# EAGLE board SparkFun_STM32 Thing Plus-Panel (EAGLE 9.6.2), part 1 of 6
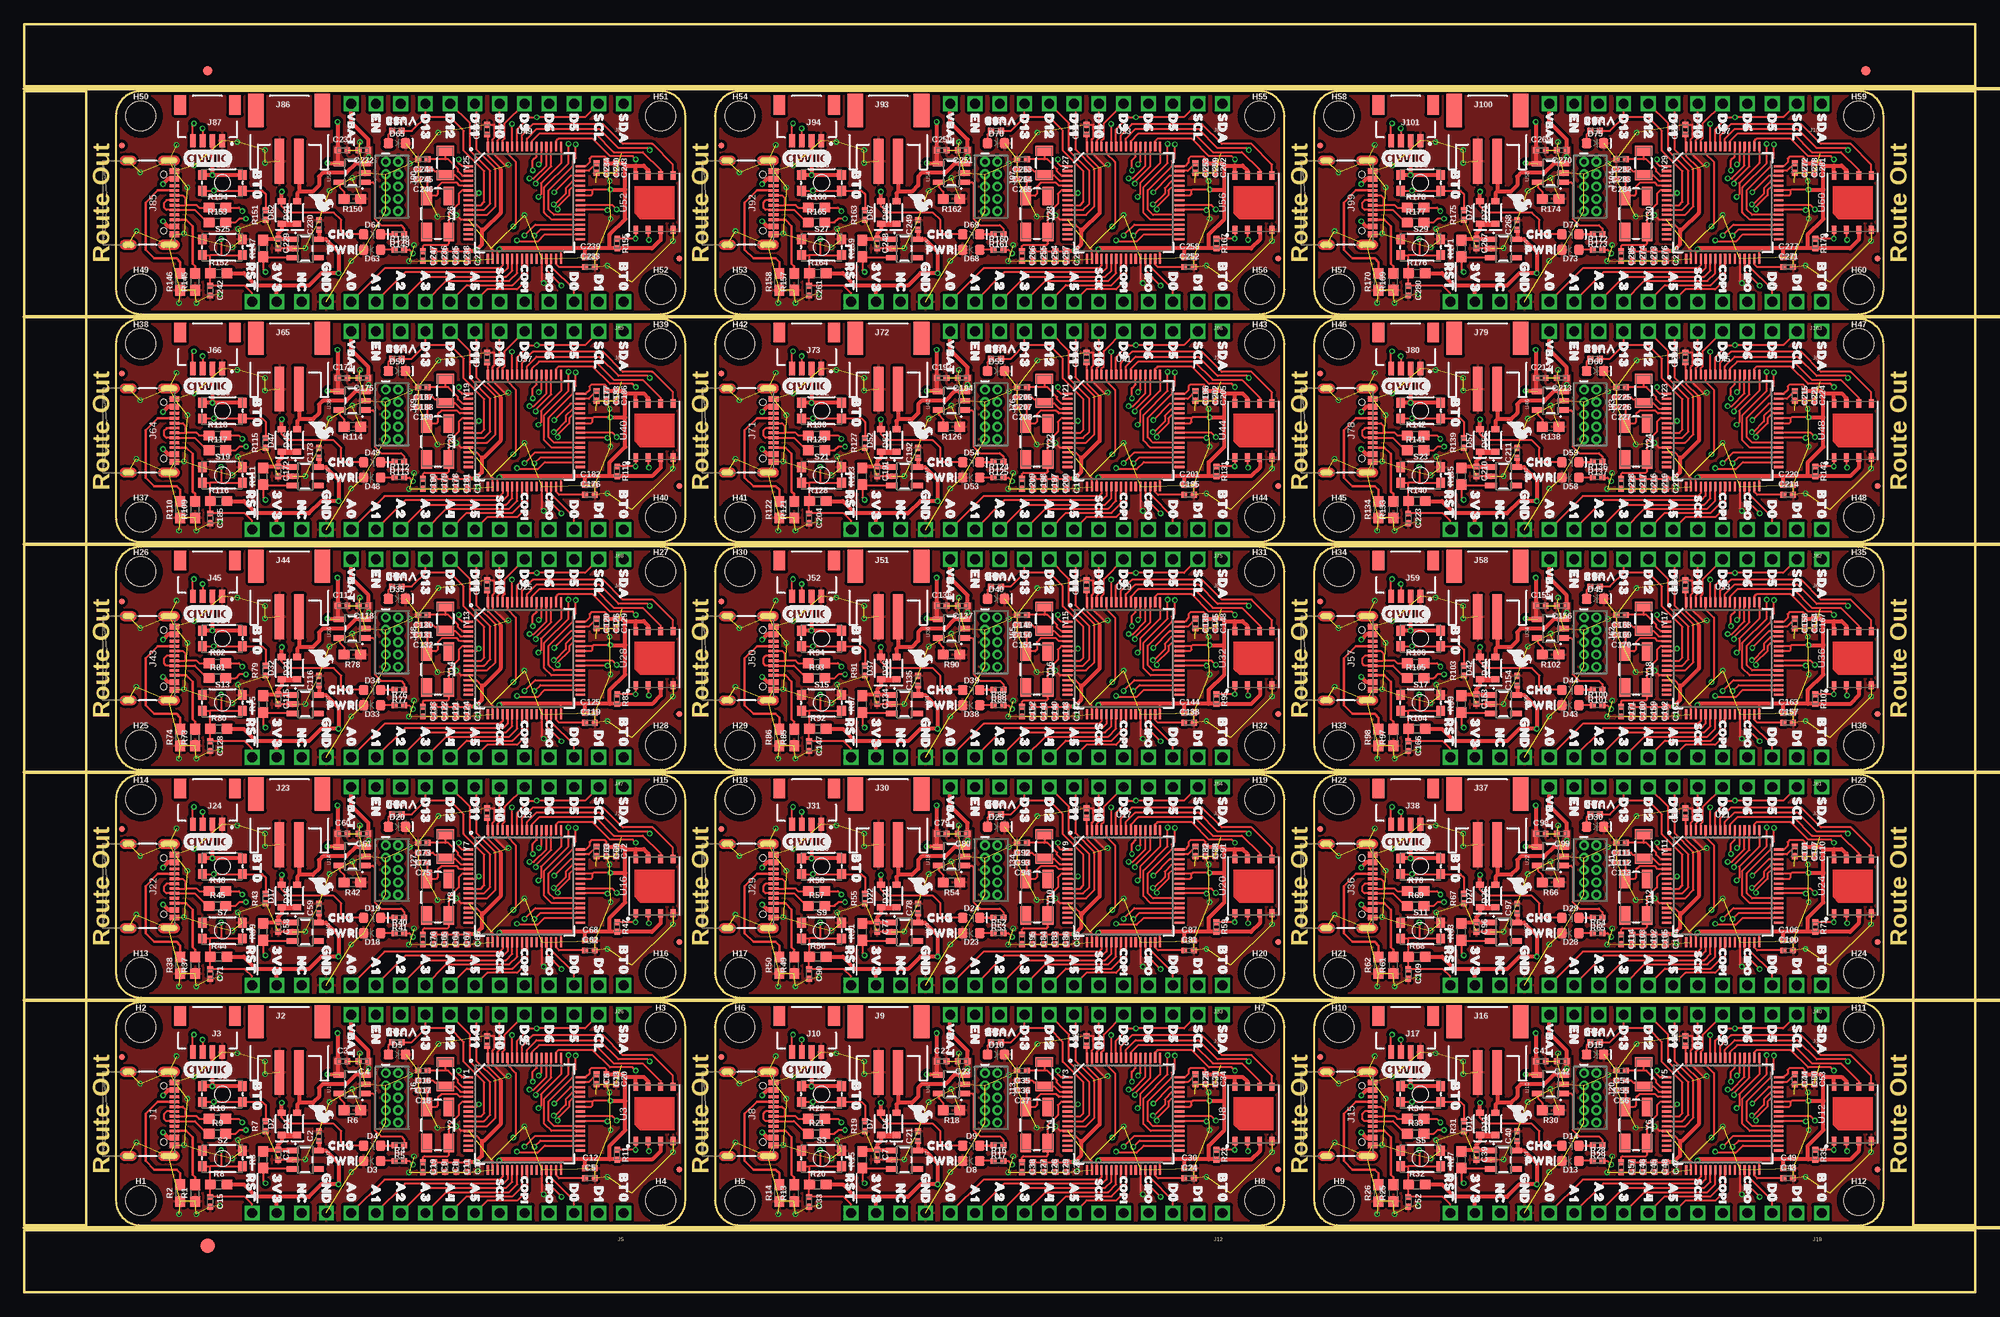
[diagram p0: board, top side]
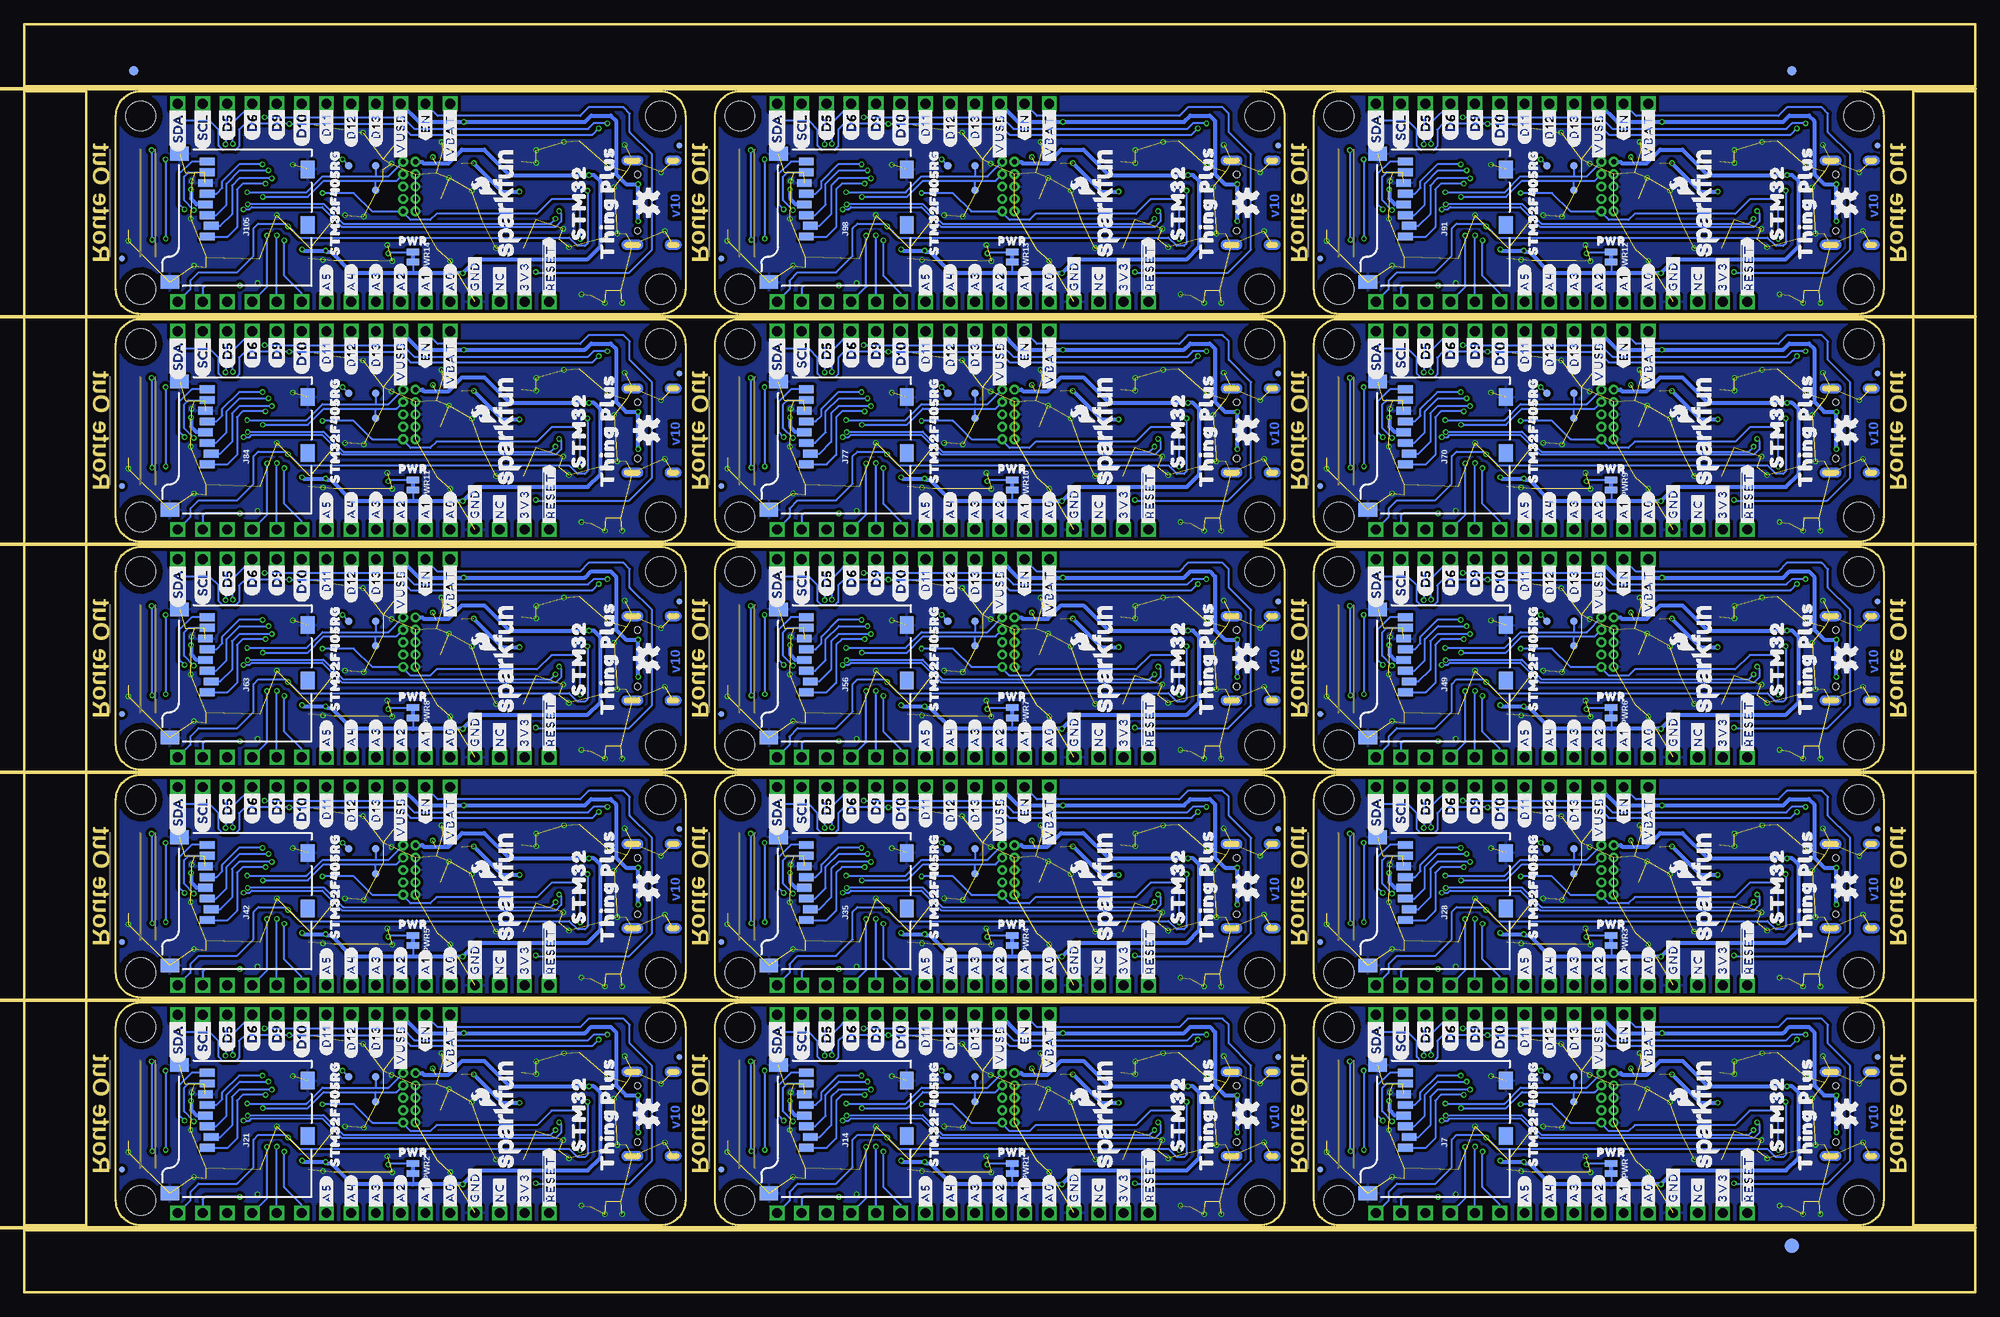
[diagram p1: board, bottom side, seen from below]

Size 200.15 x 130.05 mm. Coordinates in mm from the lower left corner, seen from the top.
Outline: 11.94,6.86 65.28,6.86 arc90 67.82,9.4 67.82,27.18 arc90 65.28,29.72 11.94,29.72 arc90 9.4,27.18 9.4,9.4 arc90 11.94,6.86
Outline: 73.41,6.86 126.75,6.86 arc90 129.29,9.4 129.29,27.18 arc90 126.75,29.72 73.41,29.72 arc90 70.87,27.18 70.87,9.4 arc90 73.41,6.86
Outline: 134.87,6.86 188.21,6.86 arc90 190.75,9.4 190.75,27.18 arc90 188.21,29.72 134.87,29.72 arc90 132.33,27.18 132.33,9.4 arc90 134.87,6.86
Outline: 11.94,30.23 65.28,30.23 arc90 67.82,32.77 67.82,50.55 arc90 65.28,53.09 11.94,53.09 arc90 9.4,50.55 9.4,32.77 arc90 11.94,30.23
Outline: 73.41,30.23 126.75,30.23 arc90 129.29,32.77 129.29,50.55 arc90 126.75,53.09 73.41,53.09 arc90 70.87,50.55 70.87,32.77 arc90 73.41,30.23
Outline: 134.87,30.23 188.21,30.23 arc90 190.75,32.77 190.75,50.55 arc90 188.21,53.09 134.87,53.09 arc90 132.33,50.55 132.33,32.77 arc90 134.87,30.23
Outline: 11.94,53.59 65.28,53.59 arc90 67.82,56.13 67.82,73.91 arc90 65.28,76.45 11.94,76.45 arc90 9.4,73.91 9.4,56.13 arc90 11.94,53.59
Outline: 73.41,53.59 126.75,53.59 arc90 129.29,56.13 129.29,73.91 arc90 126.75,76.45 73.41,76.45 arc90 70.87,73.91 70.87,56.13 arc90 73.41,53.59
Outline: 134.87,53.59 188.21,53.59 arc90 190.75,56.13 190.75,73.91 arc90 188.21,76.45 134.87,76.45 arc90 132.33,73.91 132.33,56.13 arc90 134.87,53.59
Outline: 11.94,76.96 65.28,76.96 arc90 67.82,79.5 67.82,97.28 arc90 65.28,99.82 11.94,99.82 arc90 9.4,97.28 9.4,79.5 arc90 11.94,76.96
Outline: 73.41,76.96 126.75,76.96 arc90 129.29,79.5 129.29,97.28 arc90 126.75,99.82 73.41,99.82 arc90 70.87,97.28 70.87,79.5 arc90 73.41,76.96
Outline: 134.87,76.96 188.21,76.96 arc90 190.75,79.5 190.75,97.28 arc90 188.21,99.82 134.87,99.82 arc90 132.33,97.28 132.33,79.5 arc90 134.87,76.96
Outline: 11.94,100.33 65.28,100.33 arc90 67.82,102.87 67.82,120.65 arc90 65.28,123.19 11.94,123.19 arc90 9.4,120.65 9.4,102.87 arc90 11.94,100.33
Outline: 73.41,100.33 126.75,100.33 arc90 129.29,102.87 129.29,120.65 arc90 126.75,123.19 73.41,123.19 arc90 70.87,120.65 70.87,102.87 arc90 73.41,100.33
Outline: 134.87,100.33 188.21,100.33 arc90 190.75,102.87 190.75,120.65 arc90 188.21,123.19 134.87,123.19 arc90 132.33,120.65 132.33,102.87 arc90 134.87,100.33
Outline: 0,6.35 200.15,6.35 200.15,0 0,0 0,6.35
Outline: 193.8,123.19 200.15,123.19 200.15,6.86 193.8,6.86 193.8,123.19
Outline: 0,130.05 200.15,130.05 200.15,123.7 0,123.7 0,130.05
Outline: 0,123.19 6.35,123.19 6.35,6.86 0,6.86 0,123.19
Copper layers (1*16): Top 0.035mm / dielectric 1.5mm / Bottom 0.035mm
Design rules "SparkFun_STM32 Thing Plus": minimum track width 4mil, minimum drill 6mil, track to track 4mil, track to pad 4mil, pad to pad 4mil, via to via 4mil, smd to smd 4mil, copper to edge 4mil, drill to drill 4mil, minimum pad ring 5mil, minimum via ring 5mil, stop-mask expansion 4mil, vias tented up to drill 25mil, thermal gap 10mil
Milling: 6 lines

## Footprints (pad centres in the part's own frame; a part is rotated, then mirrored left to right if it is on the bottom)
0402-TIGHT = smd 0.6 x 0.6: 1 -0.5,0; 2 0.5,0
SOD-323 = smd 0.63 x 0.83: A 1.15,0; C -1.15,0
LED-0603 = smd 1 x 1: A -0.877,0; C 0.877,0
FIDUCIAL-1X2 = smd 1 x 1: 1 0,0
FIDUCIAL-1.5X3 = smd 1.5 x 1.5: 1 0,0
FIDUCIAL-MICRO = smd 0.635 x 0.635: 1 0,0
STAND-OFF-TIGHT = hole 3.048: 0,0
USB-C-16P-2LAYER-PADS = smd 0.3 x 1: A5 -1.25,-0.34; A6 -0.25,-0.34; A7 0.25,-0.34; A8 1.25,-0.34; B5 1.75,-0.34; B6 0.75,-0.34; B7 -0.75,-0.34; B8 -1.75,-0.34 | smd 0.6 x 1: GND -3.225,-0.34; GND2 3.225,-0.34; VBUS1 -2.45,-0.34; VBUS2 2.45,-0.34 | drill 0.4 pad 0.6 long: SHLD1 -4.318,-0.915; SHLD2 4.318,-0.915; SHLD3 -4.318,-5.095; SHLD4 4.318,-5.095 | hole 0.65: -2.89,-1.445; 2.89,-1.445
JST-2-SMD = smd 1 x 4.6: 1 -1,-3.7; 2 1,-3.7 | smd 1.6 x 3.4: NC1 -3.4,1.5; NC2 3.4,1.5
JST04_1MM_RA = smd 0.6 x 1.35: 1 -1.5,0; 2 -0.5,0; 3 0.5,0; 4 1.5,0 | smd 1.2 x 2: NC1 2.8,-3.675; NC2 -2.8,-3.675
1X12_SM_SQ_NOSILK = drill 1.016 pad 1.27 square: 1 0,0; 2 2.54,0; 3 5.08,0; 4 7.62,0; 5 10.16,0; 6 12.7,0; 7 15.24,0; 8 17.78,0; 9 20.32,0; 10 22.86,0; 11 25.4,0; 12 27.94,0
1X16_SM_SQ_NOSILK = drill 1.016 pad 1.27 square: 1 0,0; 2 2.54,0; 3 5.08,0; 4 7.62,0; 5 10.16,0; 6 12.7,0; 7 15.24,0; 8 17.78,0; 9 20.32,0; 10 22.86,0; 11 25.4,0; 12 27.94,0; 13 30.48,0; 14 33.02,0; 15 35.56,0; 16 38.1,0
2X5-PTH-1.27MM-NO_SILK = drill 0.508 pad 1: 1 -2.54,-0.635; 2 -2.54,0.635; 3 -1.27,-0.635; 4 -1.27,0.635; 5 0,-0.635; 6 0,0.635; 7 1.27,-0.635; 8 1.27,0.635; 9 2.54,-0.635; 10 2.54,0.635
MICRO-SD-SOCKET = smd 1.8 x 1.4: CD1 -2.05,0.4; CD2 -7.75,0.4 | smd 0.8 x 1.5: CS/DAT3 -7.84,10.3; DAT1 -1.24,10.7; DAT2 -8.94,10.7; DI/CMD -6.74,10.7; DO/DAT0 -2.34,10.7; GND -3.44,10.9; SCLK -4.54,10.7; VCC -5.64,10.9 | smd 1.4 x 1.9: GND1 -13.6,14.55; GND3 -0.45,13.55
SMT-JUMPER_2_NC_TRACE_NO-SILK = smd 0.66 x 1.27: 1 -0.521,0; 2 0.521,0
0603 = smd 1.1 x 1: 1 -0.85,0; 2 0.85,0
TACTILE_SWITCH_SMD_4.6X2.8MM = smd 0.9 x 1: 1 -2.05,-0.8; 2 2.05,-0.8; 3 2.05,0.8; 4 -2.05,0.8
PAD.03X.03 = smd 0.762 x 0.762: P$1 0,0
SOT23-5 = smd 0.55 x 1.2: 1 -0.95,-1.3; 2 0,-1.3; 3 0.95,-1.3; 4 0.95,1.3; 5 -0.95,1.3
WSON-8-6X5 = smd 0.85 x 0.5: 1 -2.775,1.905; 2 -2.775,0.635; 3 -2.775,-0.635; 4 -2.775,-1.905; 5 2.775,-1.905; 6 2.775,-0.635; 7 2.775,0.635; 8 2.775,1.905
TQFP64 = smd 0.22 x 1: 1 -3.75,-5.75; 2 -3.25,-5.75; 3 -2.75,-5.75; 4 -2.25,-5.75; 5 -1.75,-5.75; 6 -1.25,-5.75; 7 -0.75,-5.75; 8 -0.25,-5.75; 9 0.25,-5.75; 10 0.75,-5.75; 11 1.25,-5.75; 12 1.75,-5.75; 13 2.25,-5.75; 14 2.75,-5.75; 15 3.25,-5.75; 16 3.75,-5.75; 33 3.75,5.75; 34 3.25,5.75; 35 2.75,5.75; 36 2.25,5.75; 37 1.75,5.75; 38 1.25,5.75; 39 0.75,5.75; 40 0.25,5.75; 41 -0.25,5.75; 42 -0.75,5.75; 43 -1.25,5.75; 44 -1.75,5.75; 45 -2.25,5.75; 46 -2.75,5.75; 47 -3.25,5.75; 48 -3.75,5.75 | smd 1 x 0.22: 17 5.75,-3.75; 18 5.75,-3.25; 19 5.75,-2.75; 20 5.75,-2.25; 21 5.75,-1.75; 22 5.75,-1.25; 23 5.75,-0.75; 24 5.75,-0.25; 25 5.75,0.25; 26 5.75,0.75; 27 5.75,1.25; 28 5.75,1.75; 29 5.75,2.25; 30 5.75,2.75; 31 5.75,3.25; 32 5.75,3.75; 49 -5.75,3.75; 50 -5.75,3.25; 51 -5.75,2.75; 52 -5.75,2.25; 53 -5.75,1.75; 54 -5.75,1.25; 55 -5.75,0.75; 56 -5.75,0.25; 57 -5.75,-0.25; 58 -5.75,-0.75; 59 -5.75,-1.25; 60 -5.75,-1.75; 61 -5.75,-2.25; 62 -5.75,-2.75; 63 -5.75,-3.25; 64 -5.75,-3.75
CRYSTAL-SMD-3.2X1.5MM = smd 1 x 1.8: P$1 -1.25,0; P$2 1.25,0
CRYSTAL-SMD-5X3.2-4PAD = smd 1.9 x 1.1: 1 -1.85,-1.15; 2 1.85,-1.15; 3 1.85,1.15; 4 -1.85,1.15

## Placement (x,y rotation side)
C1  1.0uF  [0402-TIGHT]  26.04,14.1 270 top
C2  1.0uF  [0402-TIGHT]  30.23,16 90 top
C3  4.7uF  [0402-TIGHT]  32.64,23.67 0 top
C4  4.7uF  [0402-TIGHT]  34.8,23.67 180 top
C5  2.2uF  [0402-TIGHT]  58.04,11.68 0 top
C6  2.2uF  [0402-TIGHT]  58.7,21.84 270 top
C7  1.0uF  [0402-TIGHT]  87.5,14.1 270 top
C8  0.1uF  [0402-TIGHT]  43.18,12.83 270 top
C9  1.0uF  [0402-TIGHT]  42.04,12.83 270 top
C10  4.7uF  [0402-TIGHT]  45.47,12.83 270 top
C11  0.1uF  [0402-TIGHT]  44.32,12.83 270 top
C12  0.1uF  [0402-TIGHT]  58.04,12.7 0 top
C13  0.1uF  [0402-TIGHT]  59.72,21.84 270 top
C14  0.1uF  [0402-TIGHT]  47.5,25.78 90 top
C15  0.1uF  [0402-TIGHT]  19.05,9.27 270 top
C16  15pF  [0402-TIGHT]  40.89,22.73 180 top
C17  15pF  [0402-TIGHT]  40.89,21.72 180 top
C18  22pF  [0402-TIGHT]  40.89,20.7 180 top
C19  22pF  [0402-TIGHT]  40.89,12.82 270 top
C20  0.1uF  [0402-TIGHT]  60.71,21.84 270 top
C21  1.0uF  [0402-TIGHT]  91.69,16 90 top
C22  4.7uF  [0402-TIGHT]  94.11,23.67 0 top
C23  4.7uF  [0402-TIGHT]  96.27,23.67 180 top
C24  2.2uF  [0402-TIGHT]  119.51,11.68 0 top
C25  2.2uF  [0402-TIGHT]  120.17,21.84 270 top
C26  0.1uF  [0402-TIGHT]  104.65,12.83 270 top
C27  1.0uF  [0402-TIGHT]  103.5,12.83 270 top
C28  4.7uF  [0402-TIGHT]  106.93,12.83 270 top
C29  0.1uF  [0402-TIGHT]  105.79,12.83 270 top
C30  0.1uF  [0402-TIGHT]  119.51,12.7 0 top
C31  0.1uF  [0402-TIGHT]  121.18,21.84 270 top
C32  0.1uF  [0402-TIGHT]  108.97,25.78 90 top
C33  0.1uF  [0402-TIGHT]  80.52,9.27 270 top
C34  0.1uF  [0402-TIGHT]  122.17,21.84 270 top
C35  15pF  [0402-TIGHT]  102.35,22.73 180 top
C36  15pF  [0402-TIGHT]  102.35,21.72 180 top
C37  22pF  [0402-TIGHT]  102.35,20.7 180 top
C38  22pF  [0402-TIGHT]  102.36,12.82 270 top
C39  1.0uF  [0402-TIGHT]  148.97,14.1 270 top
C40  1.0uF  [0402-TIGHT]  153.16,16 90 top
C41  4.7uF  [0402-TIGHT]  155.57,23.67 0 top
C42  4.7uF  [0402-TIGHT]  157.73,23.67 180 top
C43  2.2uF  [0402-TIGHT]  180.97,11.68 0 top
C44  2.2uF  [0402-TIGHT]  181.64,21.84 270 top
C45  0.1uF  [0402-TIGHT]  166.12,12.83 270 top
C46  1.0uF  [0402-TIGHT]  164.97,12.83 270 top
C47  4.7uF  [0402-TIGHT]  168.4,12.83 270 top
C48  0.1uF  [0402-TIGHT]  167.26,12.83 270 top
C49  0.1uF  [0402-TIGHT]  180.97,12.7 0 top
C50  0.1uF  [0402-TIGHT]  182.65,21.84 270 top
C51  0.1uF  [0402-TIGHT]  170.43,25.78 90 top
C52  0.1uF  [0402-TIGHT]  141.99,9.27 270 top
C53  0.1uF  [0402-TIGHT]  183.64,21.84 270 top
C54  15pF  [0402-TIGHT]  163.82,22.73 180 top
C55  15pF  [0402-TIGHT]  163.82,21.72 180 top
C56  22pF  [0402-TIGHT]  163.82,20.7 180 top
C57  22pF  [0402-TIGHT]  163.83,12.82 270 top
C58  1.0uF  [0402-TIGHT]  26.04,37.46 270 top
C59  1.0uF  [0402-TIGHT]  30.23,39.37 90 top
C60  4.7uF  [0402-TIGHT]  32.64,47.04 0 top
C61  4.7uF  [0402-TIGHT]  34.8,47.04 180 top
C62  2.2uF  [0402-TIGHT]  58.04,35.05 0 top
C63  2.2uF  [0402-TIGHT]  58.7,45.21 270 top
C64  0.1uF  [0402-TIGHT]  43.18,36.2 270 top
C65  1.0uF  [0402-TIGHT]  42.04,36.2 270 top
C66  4.7uF  [0402-TIGHT]  45.47,36.2 270 top
C67  0.1uF  [0402-TIGHT]  44.32,36.2 270 top
C68  0.1uF  [0402-TIGHT]  58.04,36.07 0 top
C69  0.1uF  [0402-TIGHT]  59.72,45.21 270 top
C70  0.1uF  [0402-TIGHT]  47.5,49.15 90 top
C71  0.1uF  [0402-TIGHT]  19.05,32.64 270 top
C72  0.1uF  [0402-TIGHT]  60.71,45.21 270 top
C73  15pF  [0402-TIGHT]  40.89,46.1 180 top
C74  15pF  [0402-TIGHT]  40.89,45.08 180 top
C75  22pF  [0402-TIGHT]  40.89,44.07 180 top
C76  22pF  [0402-TIGHT]  40.89,36.19 270 top
C77  1.0uF  [0402-TIGHT]  87.5,37.46 270 top
C78  1.0uF  [0402-TIGHT]  91.69,39.37 90 top
C79  4.7uF  [0402-TIGHT]  94.11,47.04 0 top
C80  4.7uF  [0402-TIGHT]  96.27,47.04 180 top
C81  2.2uF  [0402-TIGHT]  119.51,35.05 0 top
C82  2.2uF  [0402-TIGHT]  120.17,45.21 270 top
C83  0.1uF  [0402-TIGHT]  104.65,36.2 270 top
C84  1.0uF  [0402-TIGHT]  103.5,36.2 270 top
C85  4.7uF  [0402-TIGHT]  106.93,36.2 270 top
C86  0.1uF  [0402-TIGHT]  105.79,36.2 270 top
C87  0.1uF  [0402-TIGHT]  119.51,36.07 0 top
C88  0.1uF  [0402-TIGHT]  121.18,45.21 270 top
C89  0.1uF  [0402-TIGHT]  108.97,49.15 90 top
C90  0.1uF  [0402-TIGHT]  80.52,32.64 270 top
C91  0.1uF  [0402-TIGHT]  122.17,45.21 270 top
C92  15pF  [0402-TIGHT]  102.35,46.1 180 top
C93  15pF  [0402-TIGHT]  102.35,45.08 180 top
C94  22pF  [0402-TIGHT]  102.35,44.07 180 top
C95  22pF  [0402-TIGHT]  102.36,36.19 270 top
C96  1.0uF  [0402-TIGHT]  148.97,37.46 270 top
C97  1.0uF  [0402-TIGHT]  153.16,39.37 90 top
C98  4.7uF  [0402-TIGHT]  155.57,47.04 0 top
C99  4.7uF  [0402-TIGHT]  157.73,47.04 180 top
C100  2.2uF  [0402-TIGHT]  180.97,35.05 0 top
C101  2.2uF  [0402-TIGHT]  181.64,45.21 270 top
C102  0.1uF  [0402-TIGHT]  166.12,36.2 270 top
C103  1.0uF  [0402-TIGHT]  164.97,36.2 270 top
C104  4.7uF  [0402-TIGHT]  168.4,36.2 270 top
C105  0.1uF  [0402-TIGHT]  167.26,36.2 270 top
C106  0.1uF  [0402-TIGHT]  180.97,36.07 0 top
C107  0.1uF  [0402-TIGHT]  182.65,45.21 270 top
C108  0.1uF  [0402-TIGHT]  170.43,49.15 90 top
C109  0.1uF  [0402-TIGHT]  141.99,32.64 270 top
C110  0.1uF  [0402-TIGHT]  183.64,45.21 270 top
C111  15pF  [0402-TIGHT]  163.82,46.1 180 top
C112  15pF  [0402-TIGHT]  163.82,45.08 180 top
C113  22pF  [0402-TIGHT]  163.82,44.07 180 top
C114  22pF  [0402-TIGHT]  163.83,36.19 270 top
C115  1.0uF  [0402-TIGHT]  26.04,60.83 270 top
C116  1.0uF  [0402-TIGHT]  30.23,62.74 90 top
C117  4.7uF  [0402-TIGHT]  32.64,70.41 0 top
C118  4.7uF  [0402-TIGHT]  34.8,70.41 180 top
C119  2.2uF  [0402-TIGHT]  58.04,58.42 0 top
C120  2.2uF  [0402-TIGHT]  58.7,68.58 270 top
C121  0.1uF  [0402-TIGHT]  43.18,59.56 270 top
C122  1.0uF  [0402-TIGHT]  42.04,59.56 270 top
C123  4.7uF  [0402-TIGHT]  45.47,59.56 270 top
C124  0.1uF  [0402-TIGHT]  44.32,59.56 270 top
C125  0.1uF  [0402-TIGHT]  58.04,59.44 0 top
C126  0.1uF  [0402-TIGHT]  59.72,68.58 270 top
C127  0.1uF  [0402-TIGHT]  47.5,72.52 90 top
C128  0.1uF  [0402-TIGHT]  19.05,56.01 270 top
C129  0.1uF  [0402-TIGHT]  60.71,68.58 270 top
C130  15pF  [0402-TIGHT]  40.89,69.47 180 top
C131  15pF  [0402-TIGHT]  40.89,68.45 180 top
C132  22pF  [0402-TIGHT]  40.89,67.44 180 top
C133  22pF  [0402-TIGHT]  40.89,59.55 270 top
C134  1.0uF  [0402-TIGHT]  87.5,60.83 270 top
C135  1.0uF  [0402-TIGHT]  91.69,62.74 90 top
C136  4.7uF  [0402-TIGHT]  94.11,70.41 0 top
C137  4.7uF  [0402-TIGHT]  96.27,70.41 180 top
C138  2.2uF  [0402-TIGHT]  119.51,58.42 0 top
C139  2.2uF  [0402-TIGHT]  120.17,68.58 270 top
C140  0.1uF  [0402-TIGHT]  104.65,59.56 270 top
C141  1.0uF  [0402-TIGHT]  103.5,59.56 270 top
C142  4.7uF  [0402-TIGHT]  106.93,59.56 270 top
C143  0.1uF  [0402-TIGHT]  105.79,59.56 270 top
C144  0.1uF  [0402-TIGHT]  119.51,59.44 0 top
C145  0.1uF  [0402-TIGHT]  121.18,68.58 270 top
C146  0.1uF  [0402-TIGHT]  108.97,72.52 90 top
C147  0.1uF  [0402-TIGHT]  80.52,56.01 270 top
C148  0.1uF  [0402-TIGHT]  122.17,68.58 270 top
C149  15pF  [0402-TIGHT]  102.35,69.47 180 top
C150  15pF  [0402-TIGHT]  102.35,68.45 180 top
C151  22pF  [0402-TIGHT]  102.35,67.44 180 top
C152  22pF  [0402-TIGHT]  102.36,59.55 270 top
C153  1.0uF  [0402-TIGHT]  148.97,60.83 270 top
C154  1.0uF  [0402-TIGHT]  153.16,62.74 90 top
C155  4.7uF  [0402-TIGHT]  155.57,70.41 0 top
C156  4.7uF  [0402-TIGHT]  157.73,70.41 180 top
C157  2.2uF  [0402-TIGHT]  180.97,58.42 0 top
C158  2.2uF  [0402-TIGHT]  181.64,68.58 270 top
C159  0.1uF  [0402-TIGHT]  166.12,59.56 270 top
C160  1.0uF  [0402-TIGHT]  164.97,59.56 270 top
C161  4.7uF  [0402-TIGHT]  168.4,59.56 270 top
C162  0.1uF  [0402-TIGHT]  167.26,59.56 270 top
C163  0.1uF  [0402-TIGHT]  180.97,59.44 0 top
C164  0.1uF  [0402-TIGHT]  182.65,68.58 270 top
C165  0.1uF  [0402-TIGHT]  170.43,72.52 90 top
C166  0.1uF  [0402-TIGHT]  141.99,56.01 270 top
C167  0.1uF  [0402-TIGHT]  183.64,68.58 270 top
C168  15pF  [0402-TIGHT]  163.82,69.47 180 top
C169  15pF  [0402-TIGHT]  163.82,68.45 180 top
C170  22pF  [0402-TIGHT]  163.82,67.44 180 top
C171  22pF  [0402-TIGHT]  163.83,59.55 270 top
C172  1.0uF  [0402-TIGHT]  26.04,84.2 270 top
C173  1.0uF  [0402-TIGHT]  30.23,86.11 90 top
C174  4.7uF  [0402-TIGHT]  32.64,93.78 0 top
C175  4.7uF  [0402-TIGHT]  34.8,93.78 180 top
C176  2.2uF  [0402-TIGHT]  58.04,81.79 0 top
C177  2.2uF  [0402-TIGHT]  58.7,91.95 270 top
C178  0.1uF  [0402-TIGHT]  43.18,82.93 270 top
C179  1.0uF  [0402-TIGHT]  42.04,82.93 270 top
C180  4.7uF  [0402-TIGHT]  45.47,82.93 270 top
C181  0.1uF  [0402-TIGHT]  44.32,82.93 270 top
C182  0.1uF  [0402-TIGHT]  58.04,82.8 0 top
C183  0.1uF  [0402-TIGHT]  59.72,91.95 270 top
C184  0.1uF  [0402-TIGHT]  47.5,95.89 90 top
C185  0.1uF  [0402-TIGHT]  19.05,79.38 270 top
C186  0.1uF  [0402-TIGHT]  60.71,91.95 270 top
C187  15pF  [0402-TIGHT]  40.89,92.84 180 top
C188  15pF  [0402-TIGHT]  40.89,91.82 180 top
C189  22pF  [0402-TIGHT]  40.89,90.81 180 top
C190  22pF  [0402-TIGHT]  40.89,82.92 270 top
C191  1.0uF  [0402-TIGHT]  87.5,84.2 270 top
C192  1.0uF  [0402-TIGHT]  91.69,86.11 90 top
C193  4.7uF  [0402-TIGHT]  94.11,93.78 0 top
C194  4.7uF  [0402-TIGHT]  96.27,93.78 180 top
C195  2.2uF  [0402-TIGHT]  119.51,81.79 0 top
C196  2.2uF  [0402-TIGHT]  120.17,91.95 270 top
C197  0.1uF  [0402-TIGHT]  104.65,82.93 270 top
C198  1.0uF  [0402-TIGHT]  103.5,82.93 270 top
C199  4.7uF  [0402-TIGHT]  106.93,82.93 270 top
C200  0.1uF  [0402-TIGHT]  105.79,82.93 270 top
C201  0.1uF  [0402-TIGHT]  119.51,82.8 0 top
C202  0.1uF  [0402-TIGHT]  121.18,91.95 270 top
C203  0.1uF  [0402-TIGHT]  108.97,95.89 90 top
C204  0.1uF  [0402-TIGHT]  80.52,79.38 270 top
C205  0.1uF  [0402-TIGHT]  122.17,91.95 270 top
C206  15pF  [0402-TIGHT]  102.35,92.84 180 top
C207  15pF  [0402-TIGHT]  102.35,91.82 180 top
C208  22pF  [0402-TIGHT]  102.35,90.81 180 top
C209  22pF  [0402-TIGHT]  102.36,82.92 270 top
C210  1.0uF  [0402-TIGHT]  148.97,84.2 270 top
C211  1.0uF  [0402-TIGHT]  153.16,86.11 90 top
C212  4.7uF  [0402-TIGHT]  155.57,93.78 0 top
C213  4.7uF  [0402-TIGHT]  157.73,93.78 180 top
C214  2.2uF  [0402-TIGHT]  180.97,81.79 0 top
C215  2.2uF  [0402-TIGHT]  181.64,91.95 270 top
C216  0.1uF  [0402-TIGHT]  166.12,82.93 270 top
C217  1.0uF  [0402-TIGHT]  164.97,82.93 270 top
C218  4.7uF  [0402-TIGHT]  168.4,82.93 270 top
C219  0.1uF  [0402-TIGHT]  167.26,82.93 270 top
C220  0.1uF  [0402-TIGHT]  180.97,82.8 0 top
C221  0.1uF  [0402-TIGHT]  182.65,91.95 270 top
C222  0.1uF  [0402-TIGHT]  170.43,95.89 90 top
C223  0.1uF  [0402-TIGHT]  141.99,79.38 270 top
C224  0.1uF  [0402-TIGHT]  183.64,91.95 270 top
C225  15pF  [0402-TIGHT]  163.82,92.84 180 top
C226  15pF  [0402-TIGHT]  163.82,91.82 180 top
C227  22pF  [0402-TIGHT]  163.82,90.81 180 top
C228  22pF  [0402-TIGHT]  163.83,82.92 270 top
C229  1.0uF  [0402-TIGHT]  26.04,107.57 270 top
C230  1.0uF  [0402-TIGHT]  30.23,109.47 90 top
C231  4.7uF  [0402-TIGHT]  32.64,117.14 0 top
C232  4.7uF  [0402-TIGHT]  34.8,117.14 180 top
C233  2.2uF  [0402-TIGHT]  58.04,105.16 0 top
C234  2.2uF  [0402-TIGHT]  58.7,115.32 270 top
C235  0.1uF  [0402-TIGHT]  43.18,106.3 270 top
C236  1.0uF  [0402-TIGHT]  42.04,106.3 270 top
C237  4.7uF  [0402-TIGHT]  45.47,106.3 270 top
C238  0.1uF  [0402-TIGHT]  44.32,106.3 270 top
C239  0.1uF  [0402-TIGHT]  58.04,106.17 0 top
C240  0.1uF  [0402-TIGHT]  59.72,115.32 270 top
C241  0.1uF  [0402-TIGHT]  47.5,119.25 90 top
C242  0.1uF  [0402-TIGHT]  19.05,102.74 270 top
C243  0.1uF  [0402-TIGHT]  60.71,115.32 270 top
C244  15pF  [0402-TIGHT]  40.89,116.2 180 top
C245  15pF  [0402-TIGHT]  40.89,115.19 180 top
C246  22pF  [0402-TIGHT]  40.89,114.17 180 top
C247  22pF  [0402-TIGHT]  40.89,106.29 270 top
C248  1.0uF  [0402-TIGHT]  87.5,107.57 270 top
C249  1.0uF  [0402-TIGHT]  91.69,109.47 90 top
C250  4.7uF  [0402-TIGHT]  94.11,117.14 0 top
C251  4.7uF  [0402-TIGHT]  96.27,117.14 180 top
C252  2.2uF  [0402-TIGHT]  119.51,105.16 0 top
C253  2.2uF  [0402-TIGHT]  120.17,115.32 270 top
C254  0.1uF  [0402-TIGHT]  104.65,106.3 270 top
C255  1.0uF  [0402-TIGHT]  103.5,106.3 270 top
C256  4.7uF  [0402-TIGHT]  106.93,106.3 270 top
C257  0.1uF  [0402-TIGHT]  105.79,106.3 270 top
C258  0.1uF  [0402-TIGHT]  119.51,106.17 0 top
C259  0.1uF  [0402-TIGHT]  121.18,115.32 270 top
C260  0.1uF  [0402-TIGHT]  108.97,119.25 90 top
C261  0.1uF  [0402-TIGHT]  80.52,102.74 270 top
C262  0.1uF  [0402-TIGHT]  122.17,115.32 270 top
C263  15pF  [0402-TIGHT]  102.35,116.2 180 top
C264  15pF  [0402-TIGHT]  102.35,115.19 180 top
C265  22pF  [0402-TIGHT]  102.35,114.17 180 top
C266  22pF  [0402-TIGHT]  102.36,106.29 270 top
C267  1.0uF  [0402-TIGHT]  148.97,107.57 270 top
C268  1.0uF  [0402-TIGHT]  153.16,109.47 90 top
C269  4.7uF  [0402-TIGHT]  155.57,117.14 0 top
C270  4.7uF  [0402-TIGHT]  157.73,117.14 180 top
C271  2.2uF  [0402-TIGHT]  180.97,105.16 0 top
C272  2.2uF  [0402-TIGHT]  181.64,115.32 270 top
C273  0.1uF  [0402-TIGHT]  166.12,106.3 270 top
C274  1.0uF  [0402-TIGHT]  164.97,106.3 270 top
C275  4.7uF  [0402-TIGHT]  168.4,106.3 270 top
C276  0.1uF  [0402-TIGHT]  167.26,106.3 270 top
C277  0.1uF  [0402-TIGHT]  180.97,106.17 0 top
C278  0.1uF  [0402-TIGHT]  182.65,115.32 270 top
C279  0.1uF  [0402-TIGHT]  170.43,119.25 90 top
C280  0.1uF  [0402-TIGHT]  141.99,102.74 270 top
C281  0.1uF  [0402-TIGHT]  183.64,115.32 270 top
C282  15pF  [0402-TIGHT]  163.82,116.2 180 top
C283  15pF  [0402-TIGHT]  163.82,115.19 180 top
C284  22pF  [0402-TIGHT]  163.82,114.17 180 top
C285  22pF  [0402-TIGHT]  163.83,106.29 270 top
D1  3A/10V/280mV  [SOD-323]  28,17.27 90 top
D2  3A/10V/280mV  [SOD-323]  26.42,17.27 90 top
D3  RED  [LED-0603]  35.69,13.46 180 top
D4  Yellow  [LED-0603]  35.69,15.04 0 top
D5  BLUE  [LED-0603]  38.23,24.38 0 top
D6  3A/10V/280mV  [SOD-323]  89.47,17.27 90 top
D7  3A/10V/280mV  [SOD-323]  87.88,17.27 90 top
D8  RED  [LED-0603]  97.16,13.46 180 top
D9  Yellow  [LED-0603]  97.16,15.04 0 top
D10  BLUE  [LED-0603]  99.69,24.38 0 top
D11  3A/10V/280mV  [SOD-323]  150.94,17.27 90 top
D12  3A/10V/280mV  [SOD-323]  149.35,17.27 90 top
D13  RED  [LED-0603]  158.62,13.46 180 top
D14  Yellow  [LED-0603]  158.62,15.04 0 top
D15  BLUE  [LED-0603]  161.16,24.38 0 top
D16  3A/10V/280mV  [SOD-323]  28,40.64 90 top
D17  3A/10V/280mV  [SOD-323]  26.42,40.64 90 top
D18  RED  [LED-0603]  35.69,36.83 180 top
D19  Yellow  [LED-0603]  35.69,38.4 0 top
D20  BLUE  [LED-0603]  38.23,47.75 0 top
D21  3A/10V/280mV  [SOD-323]  89.47,40.64 90 top
D22  3A/10V/280mV  [SOD-323]  87.88,40.64 90 top
D23  RED  [LED-0603]  97.16,36.83 180 top
D24  Yellow  [LED-0603]  97.16,38.4 0 top
D25  BLUE  [LED-0603]  99.69,47.75 0 top
D26  3A/10V/280mV  [SOD-323]  150.94,40.64 90 top
D27  3A/10V/280mV  [SOD-323]  149.35,40.64 90 top
D28  RED  [LED-0603]  158.62,36.83 180 top
D29  Yellow  [LED-0603]  158.62,38.4 0 top
D30  BLUE  [LED-0603]  161.16,47.75 0 top
D31  3A/10V/280mV  [SOD-323]  28,64.01 90 top
D32  3A/10V/280mV  [SOD-323]  26.42,64.01 90 top
D33  RED  [LED-0603]  35.69,60.2 180 top
D34  Yellow  [LED-0603]  35.69,61.77 0 top
D35  BLUE  [LED-0603]  38.23,71.12 0 top
D36  3A/10V/280mV  [SOD-323]  89.47,64.01 90 top
D37  3A/10V/280mV  [SOD-323]  87.88,64.01 90 top
D38  RED  [LED-0603]  97.16,60.2 180 top
D39  Yellow  [LED-0603]  97.16,61.77 0 top
D40  BLUE  [LED-0603]  99.69,71.12 0 top
D41  3A/10V/280mV  [SOD-323]  150.94,64.01 90 top
D42  3A/10V/280mV  [SOD-323]  149.35,64.01 90 top
D43  RED  [LED-0603]  158.62,60.2 180 top
D44  Yellow  [LED-0603]  158.62,61.77 0 top
D45  BLUE  [LED-0603]  161.16,71.12 0 top
D46  3A/10V/280mV  [SOD-323]  28,87.38 90 top
D47  3A/10V/280mV  [SOD-323]  26.42,87.38 90 top
D48  RED  [LED-0603]  35.69,83.57 180 top
D49  Yellow  [LED-0603]  35.69,85.14 0 top
D50  BLUE  [LED-0603]  38.23,94.49 0 top
D51  3A/10V/280mV  [SOD-323]  89.47,87.38 90 top
D52  3A/10V/280mV  [SOD-323]  87.88,87.38 90 top
D53  RED  [LED-0603]  97.16,83.57 180 top
D54  Yellow  [LED-0603]  97.16,85.14 0 top
D55  BLUE  [LED-0603]  99.69,94.49 0 top
D56  3A/10V/280mV  [SOD-323]  150.94,87.38 90 top
D57  3A/10V/280mV  [SOD-323]  149.35,87.38 90 top
D58  RED  [LED-0603]  158.62,83.57 180 top
D59  Yellow  [LED-0603]  158.62,85.14 0 top
D60  BLUE  [LED-0603]  161.16,94.49 0 top
D61  3A/10V/280mV  [SOD-323]  28,110.74 90 top
D62  3A/10V/280mV  [SOD-323]  26.42,110.74 90 top
D63  RED  [LED-0603]  35.69,106.93 180 top
D64  Yellow  [LED-0603]  35.69,108.51 0 top
D65  BLUE  [LED-0603]  38.23,117.86 0 top
D66  3A/10V/280mV  [SOD-323]  89.47,110.74 90 top
D67  3A/10V/280mV  [SOD-323]  87.88,110.74 90 top
D68  RED  [LED-0603]  97.16,106.93 180 top
D69  Yellow  [LED-0603]  97.16,108.51 0 top
D70  BLUE  [LED-0603]  99.69,117.86 0 top
D71  3A/10V/280mV  [SOD-323]  150.94,110.74 90 top
D72  3A/10V/280mV  [SOD-323]  149.35,110.74 90 top
D73  RED  [LED-0603]  158.62,106.93 180 top
D74  Yellow  [LED-0603]  158.62,108.51 0 top
D75  BLUE  [LED-0603]  161.16,117.86 0 top
E$1  [FIDUCIAL-1X2]  18.8,125.29 0 top
E$2  [FIDUCIAL-1X2]  18.8,125.29 0 bottom
E$3  [FIDUCIAL-1X2]  188.91,125.29 0 top
E$4  [FIDUCIAL-1X2]  188.91,125.29 0 bottom
E$5  [FIDUCIAL-1.5X3]  18.8,4.76 0 top
E$6  [FIDUCIAL-1.5X3]  18.8,4.76 0 bottom
FD1  FIDUCIALUFIDUCIAL  [FIDUCIAL-MICRO]  10.03,24.13 0 top
FD2  FIDUCIALUFIDUCIAL  [FIDUCIAL-MICRO]  10.03,24.13 0 bottom
FD3  FIDUCIALUFIDUCIAL  [FIDUCIAL-MICRO]  67.18,12.57 0 top
FD4  FIDUCIALUFIDUCIAL  [FIDUCIAL-MICRO]  67.18,12.57 0 bottom
FD5  FIDUCIALUFIDUCIAL  [FIDUCIAL-MICRO]  71.5,24.13 0 top
FD6  FIDUCIALUFIDUCIAL  [FIDUCIAL-MICRO]  71.5,24.13 0 bottom
FD7  FIDUCIALUFIDUCIAL  [FIDUCIAL-MICRO]  128.65,12.57 0 top
FD8  FIDUCIALUFIDUCIAL  [FIDUCIAL-MICRO]  128.65,12.57 0 bottom
FD9  FIDUCIALUFIDUCIAL  [FIDUCIAL-MICRO]  132.97,24.13 0 top
FD10  FIDUCIALUFIDUCIAL  [FIDUCIAL-MICRO]  132.97,24.13 0 bottom
FD11  FIDUCIALUFIDUCIAL  [FIDUCIAL-MICRO]  190.12,12.57 0 top
FD12  FIDUCIALUFIDUCIAL  [FIDUCIAL-MICRO]  190.12,12.57 0 bottom
FD13  FIDUCIALUFIDUCIAL  [FIDUCIAL-MICRO]  10.03,47.5 0 top
FD14  FIDUCIALUFIDUCIAL  [FIDUCIAL-MICRO]  10.03,47.5 0 bottom
FD15  FIDUCIALUFIDUCIAL  [FIDUCIAL-MICRO]  67.18,35.94 0 top
FD16  FIDUCIALUFIDUCIAL  [FIDUCIAL-MICRO]  67.18,35.94 0 bottom
FD17  FIDUCIALUFIDUCIAL  [FIDUCIAL-MICRO]  71.5,47.5 0 top
FD18  FIDUCIALUFIDUCIAL  [FIDUCIAL-MICRO]  71.5,47.5 0 bottom
FD19  FIDUCIALUFIDUCIAL  [FIDUCIAL-MICRO]  128.65,35.94 0 top
FD20  FIDUCIALUFIDUCIAL  [FIDUCIAL-MICRO]  128.65,35.94 0 bottom
FD21  FIDUCIALUFIDUCIAL  [FIDUCIAL-MICRO]  132.97,47.5 0 top
FD22  FIDUCIALUFIDUCIAL  [FIDUCIAL-MICRO]  132.97,47.5 0 bottom
FD23  FIDUCIALUFIDUCIAL  [FIDUCIAL-MICRO]  190.12,35.94 0 top
FD24  FIDUCIALUFIDUCIAL  [FIDUCIAL-MICRO]  190.12,35.94 0 bottom
FD25  FIDUCIALUFIDUCIAL  [FIDUCIAL-MICRO]  10.03,70.87 0 top
FD26  FIDUCIALUFIDUCIAL  [FIDUCIAL-MICRO]  10.03,70.87 0 bottom
FD27  FIDUCIALUFIDUCIAL  [FIDUCIAL-MICRO]  67.18,59.31 0 top
FD28  FIDUCIALUFIDUCIAL  [FIDUCIAL-MICRO]  67.18,59.31 0 bottom
FD29  FIDUCIALUFIDUCIAL  [FIDUCIAL-MICRO]  71.5,70.87 0 top
FD30  FIDUCIALUFIDUCIAL  [FIDUCIAL-MICRO]  71.5,70.87 0 bottom
FD31  FIDUCIALUFIDUCIAL  [FIDUCIAL-MICRO]  128.65,59.31 0 top
FD32  FIDUCIALUFIDUCIAL  [FIDUCIAL-MICRO]  128.65,59.31 0 bottom
FD33  FIDUCIALUFIDUCIAL  [FIDUCIAL-MICRO]  132.97,70.87 0 top
FD34  FIDUCIALUFIDUCIAL  [FIDUCIAL-MICRO]  132.97,70.87 0 bottom
FD35  FIDUCIALUFIDUCIAL  [FIDUCIAL-MICRO]  190.12,59.31 0 top
FD36  FIDUCIALUFIDUCIAL  [FIDUCIAL-MICRO]  190.12,59.31 0 bottom
FD37  FIDUCIALUFIDUCIAL  [FIDUCIAL-MICRO]  10.03,94.23 0 top
FD38  FIDUCIALUFIDUCIAL  [FIDUCIAL-MICRO]  10.03,94.23 0 bottom
FD39  FIDUCIALUFIDUCIAL  [FIDUCIAL-MICRO]  67.18,82.68 0 top
FD40  FIDUCIALUFIDUCIAL  [FIDUCIAL-MICRO]  67.18,82.68 0 bottom
FD41  FIDUCIALUFIDUCIAL  [FIDUCIAL-MICRO]  71.5,94.23 0 top
FD42  FIDUCIALUFIDUCIAL  [FIDUCIAL-MICRO]  71.5,94.23 0 bottom
FD43  FIDUCIALUFIDUCIAL  [FIDUCIAL-MICRO]  128.65,82.68 0 top
FD44  FIDUCIALUFIDUCIAL  [FIDUCIAL-MICRO]  128.65,82.68 0 bottom
FD45  FIDUCIALUFIDUCIAL  [FIDUCIAL-MICRO]  132.97,94.23 0 top
FD46  FIDUCIALUFIDUCIAL  [FIDUCIAL-MICRO]  132.97,94.23 0 bottom
FD47  FIDUCIALUFIDUCIAL  [FIDUCIAL-MICRO]  190.12,82.68 0 top
FD48  FIDUCIALUFIDUCIAL  [FIDUCIAL-MICRO]  190.12,82.68 0 bottom
FD49  FIDUCIALUFIDUCIAL  [FIDUCIAL-MICRO]  10.03,117.6 0 top
FD50  FIDUCIALUFIDUCIAL  [FIDUCIAL-MICRO]  10.03,117.6 0 bottom
FD51  FIDUCIALUFIDUCIAL  [FIDUCIAL-MICRO]  67.18,106.05 0 top
FD52  FIDUCIALUFIDUCIAL  [FIDUCIAL-MICRO]  67.18,106.05 0 bottom
FD53  FIDUCIALUFIDUCIAL  [FIDUCIAL-MICRO]  71.5,117.6 0 top
FD54  FIDUCIALUFIDUCIAL  [FIDUCIAL-MICRO]  71.5,117.6 0 bottom
FD55  FIDUCIALUFIDUCIAL  [FIDUCIAL-MICRO]  128.65,106.05 0 top
FD56  FIDUCIALUFIDUCIAL  [FIDUCIAL-MICRO]  128.65,106.05 0 bottom
FD57  FIDUCIALUFIDUCIAL  [FIDUCIAL-MICRO]  132.97,117.6 0 top
FD58  FIDUCIALUFIDUCIAL  [FIDUCIAL-MICRO]  132.97,117.6 0 bottom
FD59  FIDUCIALUFIDUCIAL  [FIDUCIAL-MICRO]  190.12,106.05 0 top
FD60  FIDUCIALUFIDUCIAL  [FIDUCIAL-MICRO]  190.12,106.05 0 bottom
H1  STAND-OFFTIGHT  [STAND-OFF-TIGHT]  11.94,9.4 0 top
H2  STAND-OFFTIGHT  [STAND-OFF-TIGHT]  11.94,27.18 0 top
H3  STAND-OFFTIGHT  [STAND-OFF-TIGHT]  65.28,27.18 0 top
H4  STAND-OFFTIGHT  [STAND-OFF-TIGHT]  65.28,9.4 0 top
H5  STAND-OFFTIGHT  [STAND-OFF-TIGHT]  73.41,9.4 0 top
H6  STAND-OFFTIGHT  [STAND-OFF-TIGHT]  73.41,27.18 0 top
H7  STAND-OFFTIGHT  [STAND-OFF-TIGHT]  126.75,27.18 0 top
H8  STAND-OFFTIGHT  [STAND-OFF-TIGHT]  126.75,9.4 0 top
H9  STAND-OFFTIGHT  [STAND-OFF-TIGHT]  134.87,9.4 0 top
H10  STAND-OFFTIGHT  [STAND-OFF-TIGHT]  134.87,27.18 0 top
H11  STAND-OFFTIGHT  [STAND-OFF-TIGHT]  188.21,27.18 0 top
H12  STAND-OFFTIGHT  [STAND-OFF-TIGHT]  188.21,9.4 0 top
H13  STAND-OFFTIGHT  [STAND-OFF-TIGHT]  11.94,32.77 0 top
H14  STAND-OFFTIGHT  [STAND-OFF-TIGHT]  11.94,50.55 0 top
H15  STAND-OFFTIGHT  [STAND-OFF-TIGHT]  65.28,50.55 0 top
H16  STAND-OFFTIGHT  [STAND-OFF-TIGHT]  65.28,32.77 0 top
H17  STAND-OFFTIGHT  [STAND-OFF-TIGHT]  73.41,32.77 0 top
H18  STAND-OFFTIGHT  [STAND-OFF-TIGHT]  73.41,50.55 0 top
H19  STAND-OFFTIGHT  [STAND-OFF-TIGHT]  126.75,50.55 0 top
H20  STAND-OFFTIGHT  [STAND-OFF-TIGHT]  126.75,32.77 0 top
H21  STAND-OFFTIGHT  [STAND-OFF-TIGHT]  134.87,32.77 0 top
H22  STAND-OFFTIGHT  [STAND-OFF-TIGHT]  134.87,50.55 0 top
H23  STAND-OFFTIGHT  [STAND-OFF-TIGHT]  188.21,50.55 0 top
H24  STAND-OFFTIGHT  [STAND-OFF-TIGHT]  188.21,32.77 0 top
H25  STAND-OFFTIGHT  [STAND-OFF-TIGHT]  11.94,56.13 0 top
H26  STAND-OFFTIGHT  [STAND-OFF-TIGHT]  11.94,73.91 0 top
H27  STAND-OFFTIGHT  [STAND-OFF-TIGHT]  65.28,73.91 0 top
H28  STAND-OFFTIGHT  [STAND-OFF-TIGHT]  65.28,56.13 0 top
H29  STAND-OFFTIGHT  [STAND-OFF-TIGHT]  73.41,56.13 0 top
H30  STAND-OFFTIGHT  [STAND-OFF-TIGHT]  73.41,73.91 0 top
H31  STAND-OFFTIGHT  [STAND-OFF-TIGHT]  126.75,73.91 0 top
H32  STAND-OFFTIGHT  [STAND-OFF-TIGHT]  126.75,56.13 0 top
H33  STAND-OFFTIGHT  [STAND-OFF-TIGHT]  134.87,56.13 0 top
H34  STAND-OFFTIGHT  [STAND-OFF-TIGHT]  134.87,73.91 0 top
H35  STAND-OFFTIGHT  [STAND-OFF-TIGHT]  188.21,73.91 0 top
H36  STAND-OFFTIGHT  [STAND-OFF-TIGHT]  188.21,56.13 0 top
H37  STAND-OFFTIGHT  [STAND-OFF-TIGHT]  11.94,79.5 0 top
H38  STAND-OFFTIGHT  [STAND-OFF-TIGHT]  11.94,97.28 0 top
H39  STAND-OFFTIGHT  [STAND-OFF-TIGHT]  65.28,97.28 0 top
H40  STAND-OFFTIGHT  [STAND-OFF-TIGHT]  65.28,79.5 0 top
H41  STAND-OFFTIGHT  [STAND-OFF-TIGHT]  73.41,79.5 0 top
H42  STAND-OFFTIGHT  [STAND-OFF-TIGHT]  73.41,97.28 0 top
H43  STAND-OFFTIGHT  [STAND-OFF-TIGHT]  126.75,97.28 0 top
H44  STAND-OFFTIGHT  [STAND-OFF-TIGHT]  126.75,79.5 0 top
H45  STAND-OFFTIGHT  [STAND-OFF-TIGHT]  134.87,79.5 0 top
H46  STAND-OFFTIGHT  [STAND-OFF-TIGHT]  134.87,97.28 0 top
H47  STAND-OFFTIGHT  [STAND-OFF-TIGHT]  188.21,97.28 0 top
H48  STAND-OFFTIGHT  [STAND-OFF-TIGHT]  188.21,79.5 0 top
H49  STAND-OFFTIGHT  [STAND-OFF-TIGHT]  11.94,102.87 0 top
H50  STAND-OFFTIGHT  [STAND-OFF-TIGHT]  11.94,120.65 0 top
H51  STAND-OFFTIGHT  [STAND-OFF-TIGHT]  65.28,120.65 0 top
H52  STAND-OFFTIGHT  [STAND-OFF-TIGHT]  65.28,102.87 0 top
H53  STAND-OFFTIGHT  [STAND-OFF-TIGHT]  73.41,102.87 0 top
H54  STAND-OFFTIGHT  [STAND-OFF-TIGHT]  73.41,120.65 0 top
H55  STAND-OFFTIGHT  [STAND-OFF-TIGHT]  126.75,120.65 0 top
H56  STAND-OFFTIGHT  [STAND-OFF-TIGHT]  126.75,102.87 0 top
H57  STAND-OFFTIGHT  [STAND-OFF-TIGHT]  134.87,102.87 0 top
H58  STAND-OFFTIGHT  [STAND-OFF-TIGHT]  134.87,120.65 0 top
H59  STAND-OFFTIGHT  [STAND-OFF-TIGHT]  188.21,120.65 0 top
H60  STAND-OFFTIGHT  [STAND-OFF-TIGHT]  188.21,102.87 0 top
J1  [USB-C-16P-2LAYER-PADS]  15.75,18.29 270 top
J2  [JST-2-SMD]  27.18,26.24 0 top
J3  QWIIC_RA  [JST04_1MM_RA]  18.8,24.64 180 top
J4  [1X12_SM_SQ_NOSILK]  61.47,28.45 180 top
J5  [1X16_SM_SQ_NOSILK]  61.47,8.13 180 top
J6  CORTEX_DEBUG  [2X5-PTH-1.27MM-NO_SILK]  37.72,19.94 270 top
J7  MICRO-SD  [MICRO-SD-SOCKET]  47.75,23.75 90 bottom
J8  [USB-C-16P-2LAYER-PADS]  77.22,18.29 270 top
J9  [JST-2-SMD]  88.65,26.24 0 top
J10  QWIIC_RA  [JST04_1MM_RA]  80.26,24.64 180 top
J11  [1X12_SM_SQ_NOSILK]  122.94,28.45 180 top
J12  [1X16_SM_SQ_NOSILK]  122.94,8.13 180 top
J13  CORTEX_DEBUG  [2X5-PTH-1.27MM-NO_SILK]  99.19,19.94 270 top
J14  MICRO-SD  [MICRO-SD-SOCKET]  109.22,23.75 90 bottom
J15  [USB-C-16P-2LAYER-PADS]  138.68,18.29 270 top
J16  [JST-2-SMD]  150.11,26.24 0 top
J17  QWIIC_RA  [JST04_1MM_RA]  141.73,24.64 180 top
J18  [1X12_SM_SQ_NOSILK]  184.4,28.45 180 top
J19  [1X16_SM_SQ_NOSILK]  184.4,8.13 180 top
J20  CORTEX_DEBUG  [2X5-PTH-1.27MM-NO_SILK]  160.66,19.94 270 top
J21  MICRO-SD  [MICRO-SD-SOCKET]  170.69,23.75 90 bottom
J22  [USB-C-16P-2LAYER-PADS]  15.75,41.66 270 top
J23  [JST-2-SMD]  27.18,49.61 0 top
J24  QWIIC_RA  [JST04_1MM_RA]  18.8,48.01 180 top
J25  [1X12_SM_SQ_NOSILK]  61.47,51.82 180 top
J26  [1X16_SM_SQ_NOSILK]  61.47,31.5 180 top
J27  CORTEX_DEBUG  [2X5-PTH-1.27MM-NO_SILK]  37.72,43.31 270 top
J28  MICRO-SD  [MICRO-SD-SOCKET]  47.75,47.12 90 bottom
J29  [USB-C-16P-2LAYER-PADS]  77.22,41.66 270 top
J30  [JST-2-SMD]  88.65,49.61 0 top
J31  QWIIC_RA  [JST04_1MM_RA]  80.26,48.01 180 top
J32  [1X12_SM_SQ_NOSILK]  122.94,51.82 180 top
J33  [1X16_SM_SQ_NOSILK]  122.94,31.5 180 top
J34  CORTEX_DEBUG  [2X5-PTH-1.27MM-NO_SILK]  99.19,43.31 270 top
J35  MICRO-SD  [MICRO-SD-SOCKET]  109.22,47.12 90 bottom
J36  [USB-C-16P-2LAYER-PADS]  138.68,41.66 270 top
J37  [JST-2-SMD]  150.11,49.61 0 top
J38  QWIIC_RA  [JST04_1MM_RA]  141.73,48.01 180 top
J39  [1X12_SM_SQ_NOSILK]  184.4,51.82 180 top
J40  [1X16_SM_SQ_NOSILK]  184.4,31.5 180 top
J41  CORTEX_DEBUG  [2X5-PTH-1.27MM-NO_SILK]  160.66,43.31 270 top
J42  MICRO-SD  [MICRO-SD-SOCKET]  170.69,47.12 90 bottom
J43  [USB-C-16P-2LAYER-PADS]  15.75,65.02 270 top
J44  [JST-2-SMD]  27.18,72.97 0 top
J45  QWIIC_RA  [JST04_1MM_RA]  18.8,71.37 180 top
J46  [1X12_SM_SQ_NOSILK]  61.47,75.18 180 top
J47  [1X16_SM_SQ_NOSILK]  61.47,54.86 180 top
J48  CORTEX_DEBUG  [2X5-PTH-1.27MM-NO_SILK]  37.72,66.67 270 top
J49  MICRO-SD  [MICRO-SD-SOCKET]  47.75,70.48 90 bottom
J50  [USB-C-16P-2LAYER-PADS]  77.22,65.02 270 top
J51  [JST-2-SMD]  88.65,72.97 0 top
J52  QWIIC_RA  [JST04_1MM_RA]  80.26,71.37 180 top
J53  [1X12_SM_SQ_NOSILK]  122.94,75.18 180 top
J54  [1X16_SM_SQ_NOSILK]  122.94,54.86 180 top
J55  CORTEX_DEBUG  [2X5-PTH-1.27MM-NO_SILK]  99.19,66.67 270 top
J56  MICRO-SD  [MICRO-SD-SOCKET]  109.22,70.48 90 bottom
J57  [USB-C-16P-2LAYER-PADS]  138.68,65.02 270 top
J58  [JST-2-SMD]  150.11,72.97 0 top
J59  QWIIC_RA  [JST04_1MM_RA]  141.73,71.37 180 top
J60  [1X12_SM_SQ_NOSILK]  184.4,75.18 180 top
J61  [1X16_SM_SQ_NOSILK]  184.4,54.86 180 top
J62  CORTEX_DEBUG  [2X5-PTH-1.27MM-NO_SILK]  160.66,66.67 270 top
J63  MICRO-SD  [MICRO-SD-SOCKET]  170.69,70.48 90 bottom
J64  [USB-C-16P-2LAYER-PADS]  15.75,88.39 270 top
J65  [JST-2-SMD]  27.18,96.34 0 top
J66  QWIIC_RA  [JST04_1MM_RA]  18.8,94.74 180 top
J67  [1X12_SM_SQ_NOSILK]  61.47,98.55 180 top
J68  [1X16_SM_SQ_NOSILK]  61.47,78.23 180 top
J69  CORTEX_DEBUG  [2X5-PTH-1.27MM-NO_SILK]  37.72,90.04 270 top
J70  MICRO-SD  [MICRO-SD-SOCKET]  47.75,93.85 90 bottom
J71  [USB-C-16P-2LAYER-PADS]  77.22,88.39 270 top
J72  [JST-2-SMD]  88.65,96.34 0 top
J73  QWIIC_RA  [JST04_1MM_RA]  80.26,94.74 180 top
J74  [1X12_SM_SQ_NOSILK]  122.94,98.55 180 top
J75  [1X16_SM_SQ_NOSILK]  122.94,78.23 180 top
J76  CORTEX_DEBUG  [2X5-PTH-1.27MM-NO_SILK]  99.19,90.04 270 top
J77  MICRO-SD  [MICRO-SD-SOCKET]  109.22,93.85 90 bottom
J78  [USB-C-16P-2LAYER-PADS]  138.68,88.39 270 top
J79  [JST-2-SMD]  150.11,96.34 0 top
J80  QWIIC_RA  [JST04_1MM_RA]  141.73,94.74 180 top
J81  [1X12_SM_SQ_NOSILK]  184.4,98.55 180 top
J82  [1X16_SM_SQ_NOSILK]  184.4,78.23 180 top
J83  CORTEX_DEBUG  [2X5-PTH-1.27MM-NO_SILK]  160.66,90.04 270 top
J84  MICRO-SD  [MICRO-SD-SOCKET]  170.69,93.85 90 bottom
J85  [USB-C-16P-2LAYER-PADS]  15.75,111.76 270 top
J86  [JST-2-SMD]  27.18,119.71 0 top
J87  QWIIC_RA  [JST04_1MM_RA]  18.8,118.11 180 top
J88  [1X12_SM_SQ_NOSILK]  61.47,121.92 180 top
J89  [1X16_SM_SQ_NOSILK]  61.47,101.6 180 top
J90  CORTEX_DEBUG  [2X5-PTH-1.27MM-NO_SILK]  37.72,113.41 270 top
J91  MICRO-SD  [MICRO-SD-SOCKET]  47.75,117.22 90 bottom
J92  [USB-C-16P-2LAYER-PADS]  77.22,111.76 270 top
J93  [JST-2-SMD]  88.65,119.71 0 top
J94  QWIIC_RA  [JST04_1MM_RA]  80.26,118.11 180 top
J95  [1X12_SM_SQ_NOSILK]  122.94,121.92 180 top
J96  [1X16_SM_SQ_NOSILK]  122.94,101.6 180 top
J97  CORTEX_DEBUG  [2X5-PTH-1.27MM-NO_SILK]  99.19,113.41 270 top
J98  MICRO-SD  [MICRO-SD-SOCKET]  109.22,117.22 90 bottom
J99  [USB-C-16P-2LAYER-PADS]  138.68,111.76 270 top
J100  [JST-2-SMD]  150.11,119.71 0 top
J101  QWIIC_RA  [JST04_1MM_RA]  141.73,118.11 180 top
J102  [1X12_SM_SQ_NOSILK]  184.4,121.92 180 top
J103  [1X16_SM_SQ_NOSILK]  184.4,101.6 180 top
J104  CORTEX_DEBUG  [2X5-PTH-1.27MM-NO_SILK]  160.66,113.41 270 top
J105  MICRO-SD  [MICRO-SD-SOCKET]  170.69,117.22 90 bottom
LOGO1  QWIIC_LOGO_5MM  [QWIIC_5MM]  18.8,22.86 0 top
LOGO2  SFE_LOGO_NAME_FLAME.1_INCH  [SFE_LOGO_NAME_FLAME_.1]  27.69,18.29 90 bottom
LOGO3  OSHW-LOGOS  [OSHW-LOGO-S]  13.21,18.29 90 bottom
LOGO4  QWIIC_LOGO_5MM  [QWIIC_5MM]  80.26,22.86 0 top
LOGO5  SFE_LOGO_NAME_FLAME.1_INCH  [SFE_LOGO_NAME_FLAME_.1]  89.15,18.29 90 bottom
LOGO6  OSHW-LOGOS  [OSHW-LOGO-S]  74.68,18.29 90 bottom
LOGO7  QWIIC_LOGO_5MM  [QWIIC_5MM]  141.73,22.86 0 top
LOGO8  SFE_LOGO_NAME_FLAME.1_INCH  [SFE_LOGO_NAME_FLAME_.1]  150.62,18.29 90 bottom
LOGO9  OSHW-LOGOS  [OSHW-LOGO-S]  136.14,18.29 90 bottom
LOGO10  QWIIC_LOGO_5MM  [QWIIC_5MM]  18.8,46.23 0 top
LOGO11  SFE_LOGO_NAME_FLAME.1_INCH  [SFE_LOGO_NAME_FLAME_.1]  27.69,41.66 90 bottom
LOGO12  OSHW-LOGOS  [OSHW-LOGO-S]  13.21,41.66 90 bottom
LOGO13  QWIIC_LOGO_5MM  [QWIIC_5MM]  80.26,46.23 0 top
LOGO14  SFE_LOGO_NAME_FLAME.1_INCH  [SFE_LOGO_NAME_FLAME_.1]  89.15,41.66 90 bottom
LOGO15  OSHW-LOGOS  [OSHW-LOGO-S]  74.68,41.66 90 bottom
LOGO16  QWIIC_LOGO_5MM  [QWIIC_5MM]  141.73,46.23 0 top
LOGO17  SFE_LOGO_NAME_FLAME.1_INCH  [SFE_LOGO_NAME_FLAME_.1]  150.62,41.66 90 bottom
LOGO18  OSHW-LOGOS  [OSHW-LOGO-S]  136.14,41.66 90 bottom
LOGO19  QWIIC_LOGO_5MM  [QWIIC_5MM]  18.8,69.6 0 top
LOGO20  SFE_LOGO_NAME_FLAME.1_INCH  [SFE_LOGO_NAME_FLAME_.1]  27.69,65.02 90 bottom
LOGO21  OSHW-LOGOS  [OSHW-LOGO-S]  13.21,65.02 90 bottom
LOGO22  QWIIC_LOGO_5MM  [QWIIC_5MM]  80.26,69.6 0 top
LOGO23  SFE_LOGO_NAME_FLAME.1_INCH  [SFE_LOGO_NAME_FLAME_.1]  89.15,65.02 90 bottom
LOGO24  OSHW-LOGOS  [OSHW-LOGO-S]  74.68,65.02 90 bottom
LOGO25  QWIIC_LOGO_5MM  [QWIIC_5MM]  141.73,69.6 0 top
LOGO26  SFE_LOGO_NAME_FLAME.1_INCH  [SFE_LOGO_NAME_FLAME_.1]  150.62,65.02 90 bottom
LOGO27  OSHW-LOGOS  [OSHW-LOGO-S]  136.14,65.02 90 bottom
LOGO28  QWIIC_LOGO_5MM  [QWIIC_5MM]  18.8,92.96 0 top
LOGO29  SFE_LOGO_NAME_FLAME.1_INCH  [SFE_LOGO_NAME_FLAME_.1]  27.69,88.39 90 bottom
LOGO30  OSHW-LOGOS  [OSHW-LOGO-S]  13.21,88.39 90 bottom
LOGO31  QWIIC_LOGO_5MM  [QWIIC_5MM]  80.26,92.96 0 top
LOGO32  SFE_LOGO_NAME_FLAME.1_INCH  [SFE_LOGO_NAME_FLAME_.1]  89.15,88.39 90 bottom
LOGO33  OSHW-LOGOS  [OSHW-LOGO-S]  74.68,88.39 90 bottom
LOGO34  QWIIC_LOGO_5MM  [QWIIC_5MM]  141.73,92.96 0 top
LOGO35  SFE_LOGO_NAME_FLAME.1_INCH  [SFE_LOGO_NAME_FLAME_.1]  150.62,88.39 90 bottom
LOGO36  OSHW-LOGOS  [OSHW-LOGO-S]  136.14,88.39 90 bottom
LOGO37  QWIIC_LOGO_5MM  [QWIIC_5MM]  18.8,116.33 0 top
LOGO38  SFE_LOGO_NAME_FLAME.1_INCH  [SFE_LOGO_NAME_FLAME_.1]  27.69,111.76 90 bottom
LOGO39  OSHW-LOGOS  [OSHW-LOGO-S]  13.21,111.76 90 bottom
LOGO40  QWIIC_LOGO_5MM  [QWIIC_5MM]  80.26,116.33 0 top
LOGO41  SFE_LOGO_NAME_FLAME.1_INCH  [SFE_LOGO_NAME_FLAME_.1]  89.15,111.76 90 bottom
LOGO42  OSHW-LOGOS  [OSHW-LOGO-S]  74.68,111.76 90 bottom
LOGO43  QWIIC_LOGO_5MM  [QWIIC_5MM]  141.73,116.33 0 top
LOGO44  SFE_LOGO_NAME_FLAME.1_INCH  [SFE_LOGO_NAME_FLAME_.1]  150.62,111.76 90 bottom
LOGO45  OSHW-LOGOS  [OSHW-LOGO-S]  136.14,111.76 90 bottom
PWR  [SMT-JUMPER_2_NC_TRACE_NO-SILK]  37.34,12.7 270 bottom
PWR1  [SMT-JUMPER_2_NC_TRACE_NO-SILK]  98.81,12.7 270 bottom
PWR2  [SMT-JUMPER_2_NC_TRACE_NO-SILK]  160.27,12.7 270 bottom
PWR3  [SMT-JUMPER_2_NC_TRACE_NO-SILK]  37.34,36.07 270 bottom
PWR4  [SMT-JUMPER_2_NC_TRACE_NO-SILK]  98.81,36.07 270 bottom
PWR5  [SMT-JUMPER_2_NC_TRACE_NO-SILK]  160.27,36.07 270 bottom
PWR6  [SMT-JUMPER_2_NC_TRACE_NO-SILK]  37.34,59.44 270 bottom
PWR7  [SMT-JUMPER_2_NC_TRACE_NO-SILK]  98.81,59.44 270 bottom
PWR8  [SMT-JUMPER_2_NC_TRACE_NO-SILK]  160.27,59.44 270 bottom
PWR9  [SMT-JUMPER_2_NC_TRACE_NO-SILK]  37.34,82.8 270 bottom
PWR10  [SMT-JUMPER_2_NC_TRACE_NO-SILK]  98.81,82.8 270 bottom
PWR11  [SMT-JUMPER_2_NC_TRACE_NO-SILK]  160.27,82.8 270 bottom
PWR12  [SMT-JUMPER_2_NC_TRACE_NO-SILK]  37.34,106.17 270 bottom
PWR13  [SMT-JUMPER_2_NC_TRACE_NO-SILK]  98.81,106.17 270 bottom
PWR14  [SMT-JUMPER_2_NC_TRACE_NO-SILK]  160.27,106.17 270 bottom
R1  5.1k  [0603]  17.53,10.16 90 top
R2  5.1k  [0603]  16,10.16 90 top
R3  10k  [0603]  24.51,13.59 90 top
R4  1k  [0402-TIGHT]  38.48,13.46 0 top
R5  1k  [0402-TIGHT]  38.48,15.06 180 top
R6  2.0k  [0603]  33.66,18.67 180 top
R7  100k  [0402-TIGHT]  24.77,17.02 90 top
R8  4.7k  [0603]  19.94,11.05 0 top
R9  22  [0603]  19.81,16.26 0 top
R10  22  [0603]  19.81,17.78 0 top
R11  100k  [0402-TIGHT]  60.83,14.1 270 top
R12  1k  [0402-TIGHT]  38.23,25.65 0 top
R13  5.1k  [0603]  78.99,10.16 90 top
R14  5.1k  [0603]  77.47,10.16 90 top
R15  10k  [0603]  85.98,13.59 90 top
R16  1k  [0402-TIGHT]  99.95,13.46 0 top
R17  1k  [0402-TIGHT]  99.95,15.06 180 top
R18  2.0k  [0603]  95.12,18.67 180 top
R19  100k  [0402-TIGHT]  86.23,17.02 90 top
R20  4.7k  [0603]  81.41,11.05 0 top
R21  22  [0603]  81.28,16.26 0 top
R22  22  [0603]  81.28,17.78 0 top
R23  100k  [0402-TIGHT]  122.3,14.1 270 top
R24  1k  [0402-TIGHT]  99.69,25.65 0 top
R25  5.1k  [0603]  140.46,10.16 90 top
R26  5.1k  [0603]  138.94,10.16 90 top
R27  10k  [0603]  147.45,13.59 90 top
R28  1k  [0402-TIGHT]  161.42,13.46 0 top
R29  1k  [0402-TIGHT]  161.42,15.06 180 top
R30  2.0k  [0603]  156.59,18.67 180 top
R31  100k  [0402-TIGHT]  147.7,17.02 90 top
R32  4.7k  [0603]  142.88,11.05 0 top
R33  22  [0603]  142.75,16.26 0 top
R34  22  [0603]  142.75,17.78 0 top
R35  100k  [0402-TIGHT]  183.77,14.1 270 top
R36  1k  [0402-TIGHT]  161.16,25.65 0 top
R37  5.1k  [0603]  17.53,33.53 90 top
R38  5.1k  [0603]  16,33.53 90 top
R39  10k  [0603]  24.51,36.96 90 top
R40  1k  [0402-TIGHT]  38.48,36.83 0 top
R41  1k  [0402-TIGHT]  38.48,38.43 180 top
R42  2.0k  [0603]  33.66,42.04 180 top
R43  100k  [0402-TIGHT]  24.77,40.39 90 top
R44  4.7k  [0603]  19.94,34.42 0 top
R45  22  [0603]  19.81,39.62 0 top
R46  22  [0603]  19.81,41.15 0 top
R47  100k  [0402-TIGHT]  60.83,37.46 270 top
R48  1k  [0402-TIGHT]  38.23,49.02 0 top
R49  5.1k  [0603]  78.99,33.53 90 top
R50  5.1k  [0603]  77.47,33.53 90 top
R51  10k  [0603]  85.98,36.96 90 top
R52  1k  [0402-TIGHT]  99.95,36.83 0 top
R53  1k  [0402-TIGHT]  99.95,38.43 180 top
R54  2.0k  [0603]  95.12,42.04 180 top
R55  100k  [0402-TIGHT]  86.23,40.39 90 top
R56  4.7k  [0603]  81.41,34.42 0 top
R57  22  [0603]  81.28,39.62 0 top
R58  22  [0603]  81.28,41.15 0 top
R59  100k  [0402-TIGHT]  122.3,37.46 270 top
R60  1k  [0402-TIGHT]  99.69,49.02 0 top
R61  5.1k  [0603]  140.46,33.53 90 top
R62  5.1k  [0603]  138.94,33.53 90 top
R63  10k  [0603]  147.45,36.96 90 top
R64  1k  [0402-TIGHT]  161.42,36.83 0 top
R65  1k  [0402-TIGHT]  161.42,38.43 180 top
R66  2.0k  [0603]  156.59,42.04 180 top
R67  100k  [0402-TIGHT]  147.7,40.39 90 top
R68  4.7k  [0603]  142.88,34.42 0 top
R69  22  [0603]  142.75,39.62 0 top
R70  22  [0603]  142.75,41.15 0 top
R71  100k  [0402-TIGHT]  183.77,37.46 270 top
R72  1k  [0402-TIGHT]  161.16,49.02 0 top
R73  5.1k  [0603]  17.53,56.9 90 top
R74  5.1k  [0603]  16,56.9 90 top
R75  10k  [0603]  24.51,60.32 90 top
R76  1k  [0402-TIGHT]  38.48,60.2 0 top
R77  1k  [0402-TIGHT]  38.48,61.8 180 top
R78  2.0k  [0603]  33.66,65.41 180 top
R79  100k  [0402-TIGHT]  24.77,63.75 90 top
R80  4.7k  [0603]  19.94,57.78 0 top
R81  22  [0603]  19.81,62.99 0 top
R82  22  [0603]  19.81,64.52 0 top
R83  100k  [0402-TIGHT]  60.83,60.83 270 top
R84  1k  [0402-TIGHT]  38.23,72.39 0 top
R85  5.1k  [0603]  78.99,56.9 90 top
R86  5.1k  [0603]  77.47,56.9 90 top
R87  10k  [0603]  85.98,60.32 90 top
R88  1k  [0402-TIGHT]  99.95,60.2 0 top
R89  1k  [0402-TIGHT]  99.95,61.8 180 top
R90  2.0k  [0603]  95.12,65.41 180 top
R91  100k  [0402-TIGHT]  86.23,63.75 90 top
R92  4.7k  [0603]  81.41,57.78 0 top
R93  22  [0603]  81.28,62.99 0 top
R94  22  [0603]  81.28,64.52 0 top
R95  100k  [0402-TIGHT]  122.3,60.83 270 top
R96  1k  [0402-TIGHT]  99.69,72.39 0 top
R97  5.1k  [0603]  140.46,56.9 90 top
R98  5.1k  [0603]  138.94,56.9 90 top
R99  10k  [0603]  147.45,60.32 90 top
R100  1k  [0402-TIGHT]  161.42,60.2 0 top
R101  1k  [0402-TIGHT]  161.42,61.8 180 top
R102  2.0k  [0603]  156.59,65.41 180 top
R103  100k  [0402-TIGHT]  147.7,63.75 90 top
R104  4.7k  [0603]  142.88,57.78 0 top
R105  22  [0603]  142.75,62.99 0 top
R106  22  [0603]  142.75,64.52 0 top
R107  100k  [0402-TIGHT]  183.77,60.83 270 top
R108  1k  [0402-TIGHT]  161.16,72.39 0 top
R109  5.1k  [0603]  17.53,80.26 90 top
R110  5.1k  [0603]  16,80.26 90 top
R111  10k  [0603]  24.51,83.69 90 top
R112  1k  [0402-TIGHT]  38.48,83.57 0 top
R113  1k  [0402-TIGHT]  38.48,85.17 180 top
R114  2.0k  [0603]  33.66,88.77 180 top
R115  100k  [0402-TIGHT]  24.77,87.12 90 top
R116  4.7k  [0603]  19.94,81.15 0 top
R117  22  [0603]  19.81,86.36 0 top
R118  22  [0603]  19.81,87.88 0 top
R119  100k  [0402-TIGHT]  60.83,84.2 270 top
R120  1k  [0402-TIGHT]  38.23,95.76 0 top
R121  5.1k  [0603]  78.99,80.26 90 top
R122  5.1k  [0603]  77.47,80.26 90 top
R123  10k  [0603]  85.98,83.69 90 top
R124  1k  [0402-TIGHT]  99.95,83.57 0 top
R125  1k  [0402-TIGHT]  99.95,85.17 180 top
R126  2.0k  [0603]  95.12,88.77 180 top
R127  100k  [0402-TIGHT]  86.23,87.12 90 top
R128  4.7k  [0603]  81.41,81.15 0 top
R129  22  [0603]  81.28,86.36 0 top
R130  22  [0603]  81.28,87.88 0 top
R131  100k  [0402-TIGHT]  122.3,84.2 270 top
R132  1k  [0402-TIGHT]  99.69,95.76 0 top
R133  5.1k  [0603]  140.46,80.26 90 top
R134  5.1k  [0603]  138.94,80.26 90 top
R135  10k  [0603]  147.45,83.69 90 top
R136  1k  [0402-TIGHT]  161.42,83.57 0 top
R137  1k  [0402-TIGHT]  161.42,85.17 180 top
R138  2.0k  [0603]  156.59,88.77 180 top
R139  100k  [0402-TIGHT]  147.7,87.12 90 top
R140  4.7k  [0603]  142.88,81.15 0 top
R141  22  [0603]  142.75,86.36 0 top
R142  22  [0603]  142.75,87.88 0 top
R143  100k  [0402-TIGHT]  183.77,84.2 270 top
R144  1k  [0402-TIGHT]  161.16,95.76 0 top
R145  5.1k  [0603]  17.53,103.63 90 top
R146  5.1k  [0603]  16,103.63 90 top
R147  10k  [0603]  24.51,107.06 90 top
R148  1k  [0402-TIGHT]  38.48,106.93 0 top
R149  1k  [0402-TIGHT]  38.48,108.53 180 top
R150  2.0k  [0603]  33.66,112.14 180 top
R151  100k  [0402-TIGHT]  24.77,110.49 90 top
R152  4.7k  [0603]  19.94,104.52 0 top
R153  22  [0603]  19.81,109.73 0 top
R154  22  [0603]  19.81,111.25 0 top
R155  100k  [0402-TIGHT]  60.83,107.57 270 top
R156  1k  [0402-TIGHT]  38.23,119.13 0 top
R157  5.1k  [0603]  78.99,103.63 90 top
R158  5.1k  [0603]  77.47,103.63 90 top
R159  10k  [0603]  85.98,107.06 90 top
R160  1k  [0402-TIGHT]  99.95,106.93 0 top
R161  1k  [0402-TIGHT]  99.95,108.53 180 top
R162  2.0k  [0603]  95.12,112.14 180 top
R163  100k  [0402-TIGHT]  86.23,110.49 90 top
R164  4.7k  [0603]  81.41,104.52 0 top
R165  22  [0603]  81.28,109.73 0 top
R166  22  [0603]  81.28,111.25 0 top
R167  100k  [0402-TIGHT]  122.3,107.57 270 top
R168  1k  [0402-TIGHT]  99.69,119.13 0 top
R169  5.1k  [0603]  140.46,103.63 90 top
R170  5.1k  [0603]  138.94,103.63 90 top
R171  10k  [0603]  147.45,107.06 90 top
R172  1k  [0402-TIGHT]  161.42,106.93 0 top
R173  1k  [0402-TIGHT]  161.42,108.53 180 top
R174  2.0k  [0603]  156.59,112.14 180 top
R175  100k  [0402-TIGHT]  147.7,110.49 90 top
R176  4.7k  [0603]  142.88,104.52 0 top
R177  22  [0603]  142.75,109.73 0 top
R178  22  [0603]  142.75,111.25 0 top
R179  100k  [0402-TIGHT]  183.77,107.57 270 top
R180  1k  [0402-TIGHT]  161.16,119.13 0 top
S1  [TACTILE_SWITCH_SMD_4.6X2.8MM]  20.32,20.32 0 top
S2  [TACTILE_SWITCH_SMD_4.6X2.8MM]  20.32,13.72 0 top
S3  [TACTILE_SWITCH_SMD_4.6X2.8MM]  81.79,13.72 0 top
S4  [TACTILE_SWITCH_SMD_4.6X2.8MM]  81.79,20.32 0 top
S5  [TACTILE_SWITCH_SMD_4.6X2.8MM]  143.26,13.72 0 top
S6  [TACTILE_SWITCH_SMD_4.6X2.8MM]  143.26,20.32 0 top
S7  [TACTILE_SWITCH_SMD_4.6X2.8MM]  20.32,37.08 0 top
S8  [TACTILE_SWITCH_SMD_4.6X2.8MM]  20.32,43.69 0 top
S9  [TACTILE_SWITCH_SMD_4.6X2.8MM]  81.79,37.08 0 top
S10  [TACTILE_SWITCH_SMD_4.6X2.8MM]  81.79,43.69 0 top
S11  [TACTILE_SWITCH_SMD_4.6X2.8MM]  143.26,37.08 0 top
S12  [TACTILE_SWITCH_SMD_4.6X2.8MM]  143.26,43.69 0 top
S13  [TACTILE_SWITCH_SMD_4.6X2.8MM]  20.32,60.45 0 top
S14  [TACTILE_SWITCH_SMD_4.6X2.8MM]  20.32,67.06 0 top
S15  [TACTILE_SWITCH_SMD_4.6X2.8MM]  81.79,60.45 0 top
S16  [TACTILE_SWITCH_SMD_4.6X2.8MM]  81.79,67.06 0 top
S17  [TACTILE_SWITCH_SMD_4.6X2.8MM]  143.26,60.45 0 top
S18  [TACTILE_SWITCH_SMD_4.6X2.8MM]  143.26,67.06 0 top
S19  [TACTILE_SWITCH_SMD_4.6X2.8MM]  20.32,83.82 0 top
S20  [TACTILE_SWITCH_SMD_4.6X2.8MM]  20.32,90.42 0 top
S21  [TACTILE_SWITCH_SMD_4.6X2.8MM]  81.79,83.82 0 top
S22  [TACTILE_SWITCH_SMD_4.6X2.8MM]  81.79,90.42 0 top
S23  [TACTILE_SWITCH_SMD_4.6X2.8MM]  143.26,83.82 0 top
S24  [TACTILE_SWITCH_SMD_4.6X2.8MM]  143.26,90.42 0 top
S25  [TACTILE_SWITCH_SMD_4.6X2.8MM]  20.32,107.19 0 top
S26  [TACTILE_SWITCH_SMD_4.6X2.8MM]  20.32,113.79 0 top
S27  [TACTILE_SWITCH_SMD_4.6X2.8MM]  81.79,107.19 0 top
S28  [TACTILE_SWITCH_SMD_4.6X2.8MM]  81.79,113.79 0 top
S29  [TACTILE_SWITCH_SMD_4.6X2.8MM]  143.26,107.19 0 top
S30  [TACTILE_SWITCH_SMD_4.6X2.8MM]  143.26,113.79 0 top
TP1  [PAD.03X.03]  41.15,22.1 0 bottom
TP2  [PAD.03X.03]  41.15,19.56 0 bottom
TP3  [PAD.03X.03]  102.62,22.1 0 bottom
TP4  [PAD.03X.03]  102.62,19.56 0 bottom
TP5  [PAD.03X.03]  164.08,22.1 0 bottom
TP6  [PAD.03X.03]  164.08,19.56 0 bottom
TP7  [PAD.03X.03]  41.15,45.47 0 bottom
TP8  [PAD.03X.03]  41.15,42.93 0 bottom
TP9  [PAD.03X.03]  102.62,45.47 0 bottom
TP10  [PAD.03X.03]  102.62,42.93 0 bottom
TP11  [PAD.03X.03]  164.08,45.47 0 bottom
TP12  [PAD.03X.03]  164.08,42.93 0 bottom
TP13  [PAD.03X.03]  41.15,68.83 0 bottom
TP14  [PAD.03X.03]  41.15,66.29 0 bottom
TP15  [PAD.03X.03]  102.62,68.83 0 bottom
TP16  [PAD.03X.03]  102.62,66.29 0 bottom
TP17  [PAD.03X.03]  164.08,68.83 0 bottom
TP18  [PAD.03X.03]  164.08,66.29 0 bottom
TP19  [PAD.03X.03]  41.15,92.2 0 bottom
TP20  [PAD.03X.03]  41.15,89.66 0 bottom
TP21  [PAD.03X.03]  102.62,92.2 0 bottom
TP22  [PAD.03X.03]  102.62,89.66 0 bottom
TP23  [PAD.03X.03]  164.08,92.2 0 bottom
TP24  [PAD.03X.03]  164.08,89.66 0 bottom
TP25  [PAD.03X.03]  41.15,115.57 0 bottom
TP26  [PAD.03X.03]  41.15,113.03 0 bottom
TP27  [PAD.03X.03]  102.62,115.57 0 bottom
TP28  [PAD.03X.03]  102.62,113.03 0 bottom
TP29  [PAD.03X.03]  164.08,115.57 0 bottom
TP30  [PAD.03X.03]  164.08,113.03 0 bottom
U1  MCP73831  [SOT23-5]  33.66,21.34 90 top
U2  3.3V  [SOT23-5]  28.83,13.59 270 top
U3  W25QXX128MBIT-6X5  [WSON-8-6X5]  64.64,18.29 90 top
U4  STM32F405RGT6  [TQFP64]  51.31,18.29 270 top
U5  STM32F405RGT6  [TQFP64]  112.78,18.29 270 top
U6  MCP73831  [SOT23-5]  95.12,21.34 90 top
U7  3.3V  [SOT23-5]  90.3,13.59 270 top
U8  W25QXX128MBIT-6X5  [WSON-8-6X5]  126.11,18.29 90 top
U9  STM32F405RGT6  [TQFP64]  174.24,18.29 270 top
U10  MCP73831  [SOT23-5]  156.59,21.34 90 top
U11  3.3V  [SOT23-5]  151.76,13.59 270 top
U12  W25QXX128MBIT-6X5  [WSON-8-6X5]  187.58,18.29 90 top
U13  STM32F405RGT6  [TQFP64]  51.31,41.66 270 top
U14  MCP73831  [SOT23-5]  33.66,44.7 90 top
U15  3.3V  [SOT23-5]  28.83,36.96 270 top
U16  W25QXX128MBIT-6X5  [WSON-8-6X5]  64.64,41.66 90 top
U17  STM32F405RGT6  [TQFP64]  112.78,41.66 270 top
U18  MCP73831  [SOT23-5]  95.12,44.7 90 top
U19  3.3V  [SOT23-5]  90.3,36.96 270 top
U20  W25QXX128MBIT-6X5  [WSON-8-6X5]  126.11,41.66 90 top
U21  STM32F405RGT6  [TQFP64]  174.24,41.66 270 top
U22  MCP73831  [SOT23-5]  156.59,44.7 90 top
U23  3.3V  [SOT23-5]  151.76,36.96 270 top
U24  W25QXX128MBIT-6X5  [WSON-8-6X5]  187.58,41.66 90 top
U25  STM32F405RGT6  [TQFP64]  51.31,65.02 270 top
U26  MCP73831  [SOT23-5]  33.66,68.07 90 top
U27  3.3V  [SOT23-5]  28.83,60.32 270 top
U28  W25QXX128MBIT-6X5  [WSON-8-6X5]  64.64,65.02 90 top
U29  STM32F405RGT6  [TQFP64]  112.78,65.02 270 top
U30  MCP73831  [SOT23-5]  95.12,68.07 90 top
U31  3.3V  [SOT23-5]  90.3,60.32 270 top
U32  W25QXX128MBIT-6X5  [WSON-8-6X5]  126.11,65.02 90 top
U33  STM32F405RGT6  [TQFP64]  174.24,65.02 270 top
U34  MCP73831  [SOT23-5]  156.59,68.07 90 top
U35  3.3V  [SOT23-5]  151.76,60.32 270 top
U36  W25QXX128MBIT-6X5  [WSON-8-6X5]  187.58,65.02 90 top
U37  STM32F405RGT6  [TQFP64]  51.31,88.39 270 top
U38  MCP73831  [SOT23-5]  33.66,91.44 90 top
U39  3.3V  [SOT23-5]  28.83,83.69 270 top
U40  W25QXX128MBIT-6X5  [WSON-8-6X5]  64.64,88.39 90 top
U41  STM32F405RGT6  [TQFP64]  112.78,88.39 270 top
U42  MCP73831  [SOT23-5]  95.12,91.44 90 top
U43  3.3V  [SOT23-5]  90.3,83.69 270 top
U44  W25QXX128MBIT-6X5  [WSON-8-6X5]  126.11,88.39 90 top